# Altium PCB High Power Brushed DC MC.PcbDoc (part 1 of 2)
Units mil, origin at the board's own origin, x right, y up, seen from the top; angles counter-clockwise.
Board outline 3543.31 x 3641.73 mil, 4 copper layers (Top Layer, Ground, Power, Bottom Layer), stack 72.868 mil thick; 81 components, 28 nets, 205 pads, 180 vias.
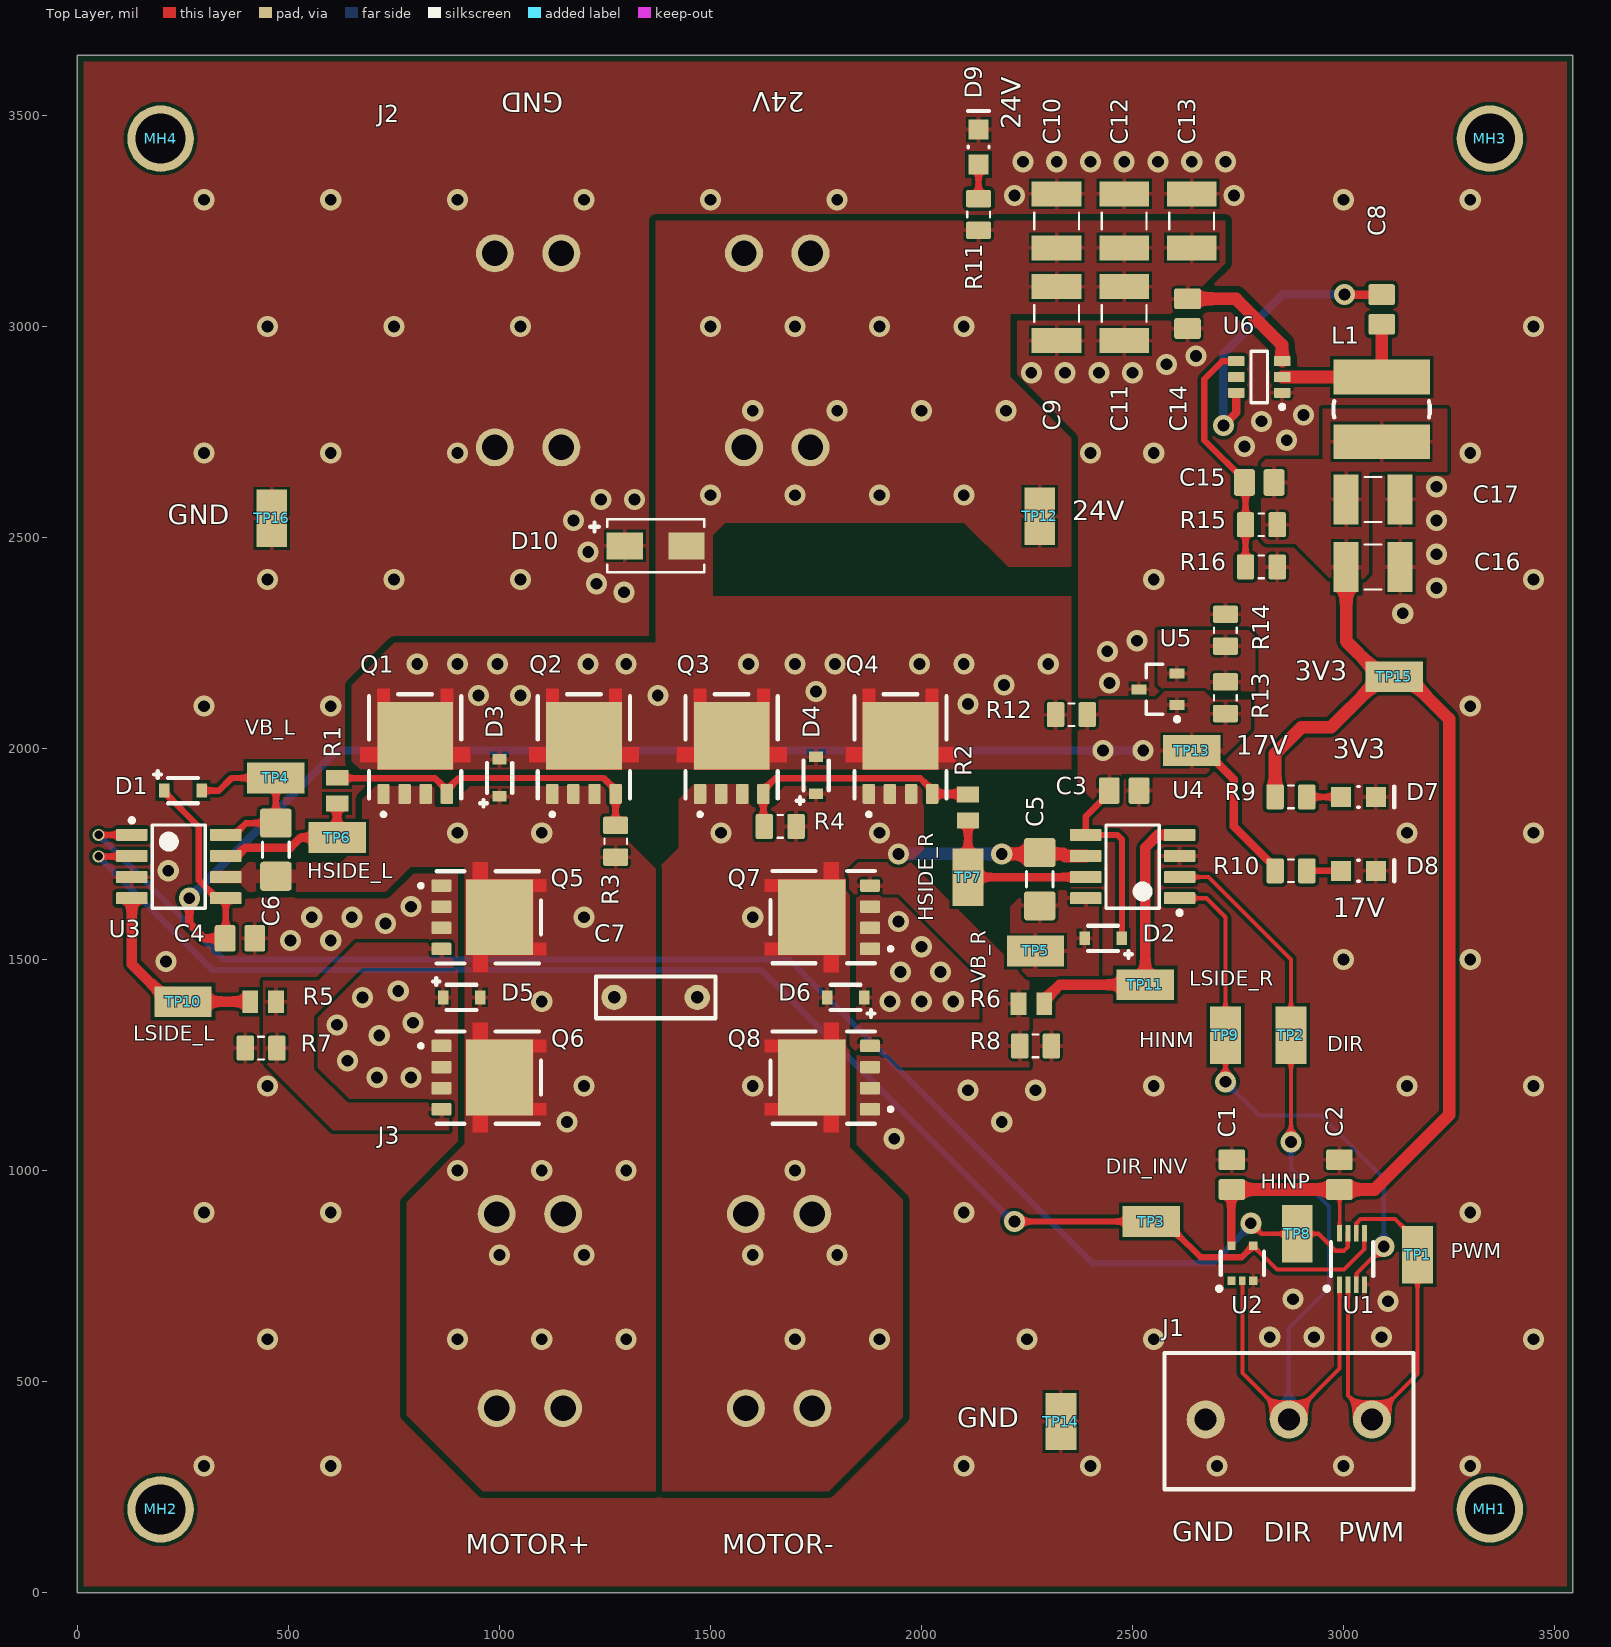
[diagram p0: Top Layer view]
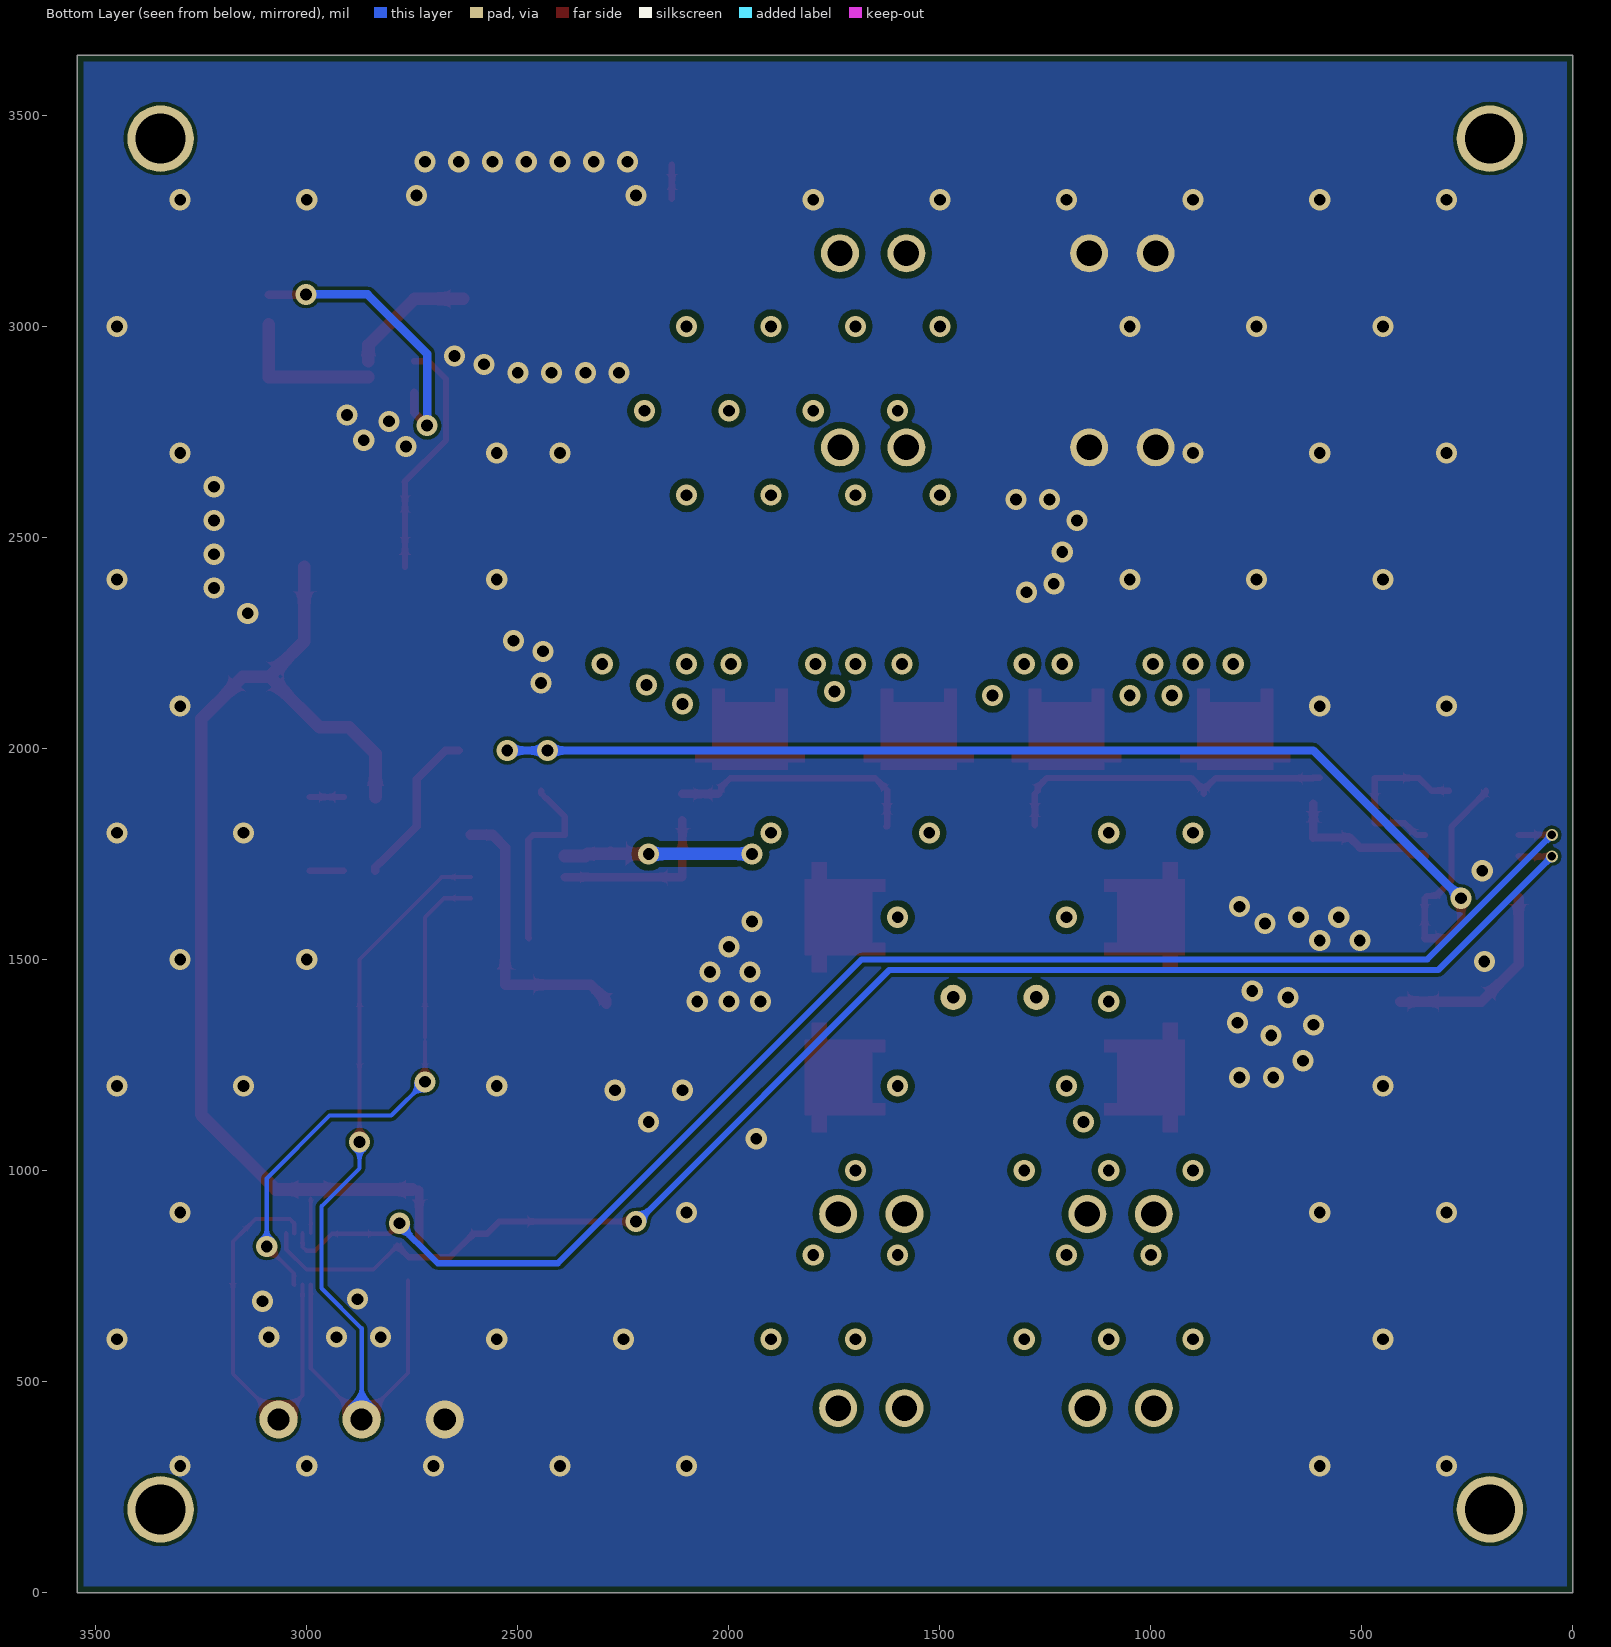
[diagram p1: Bottom Layer view, seen from below]
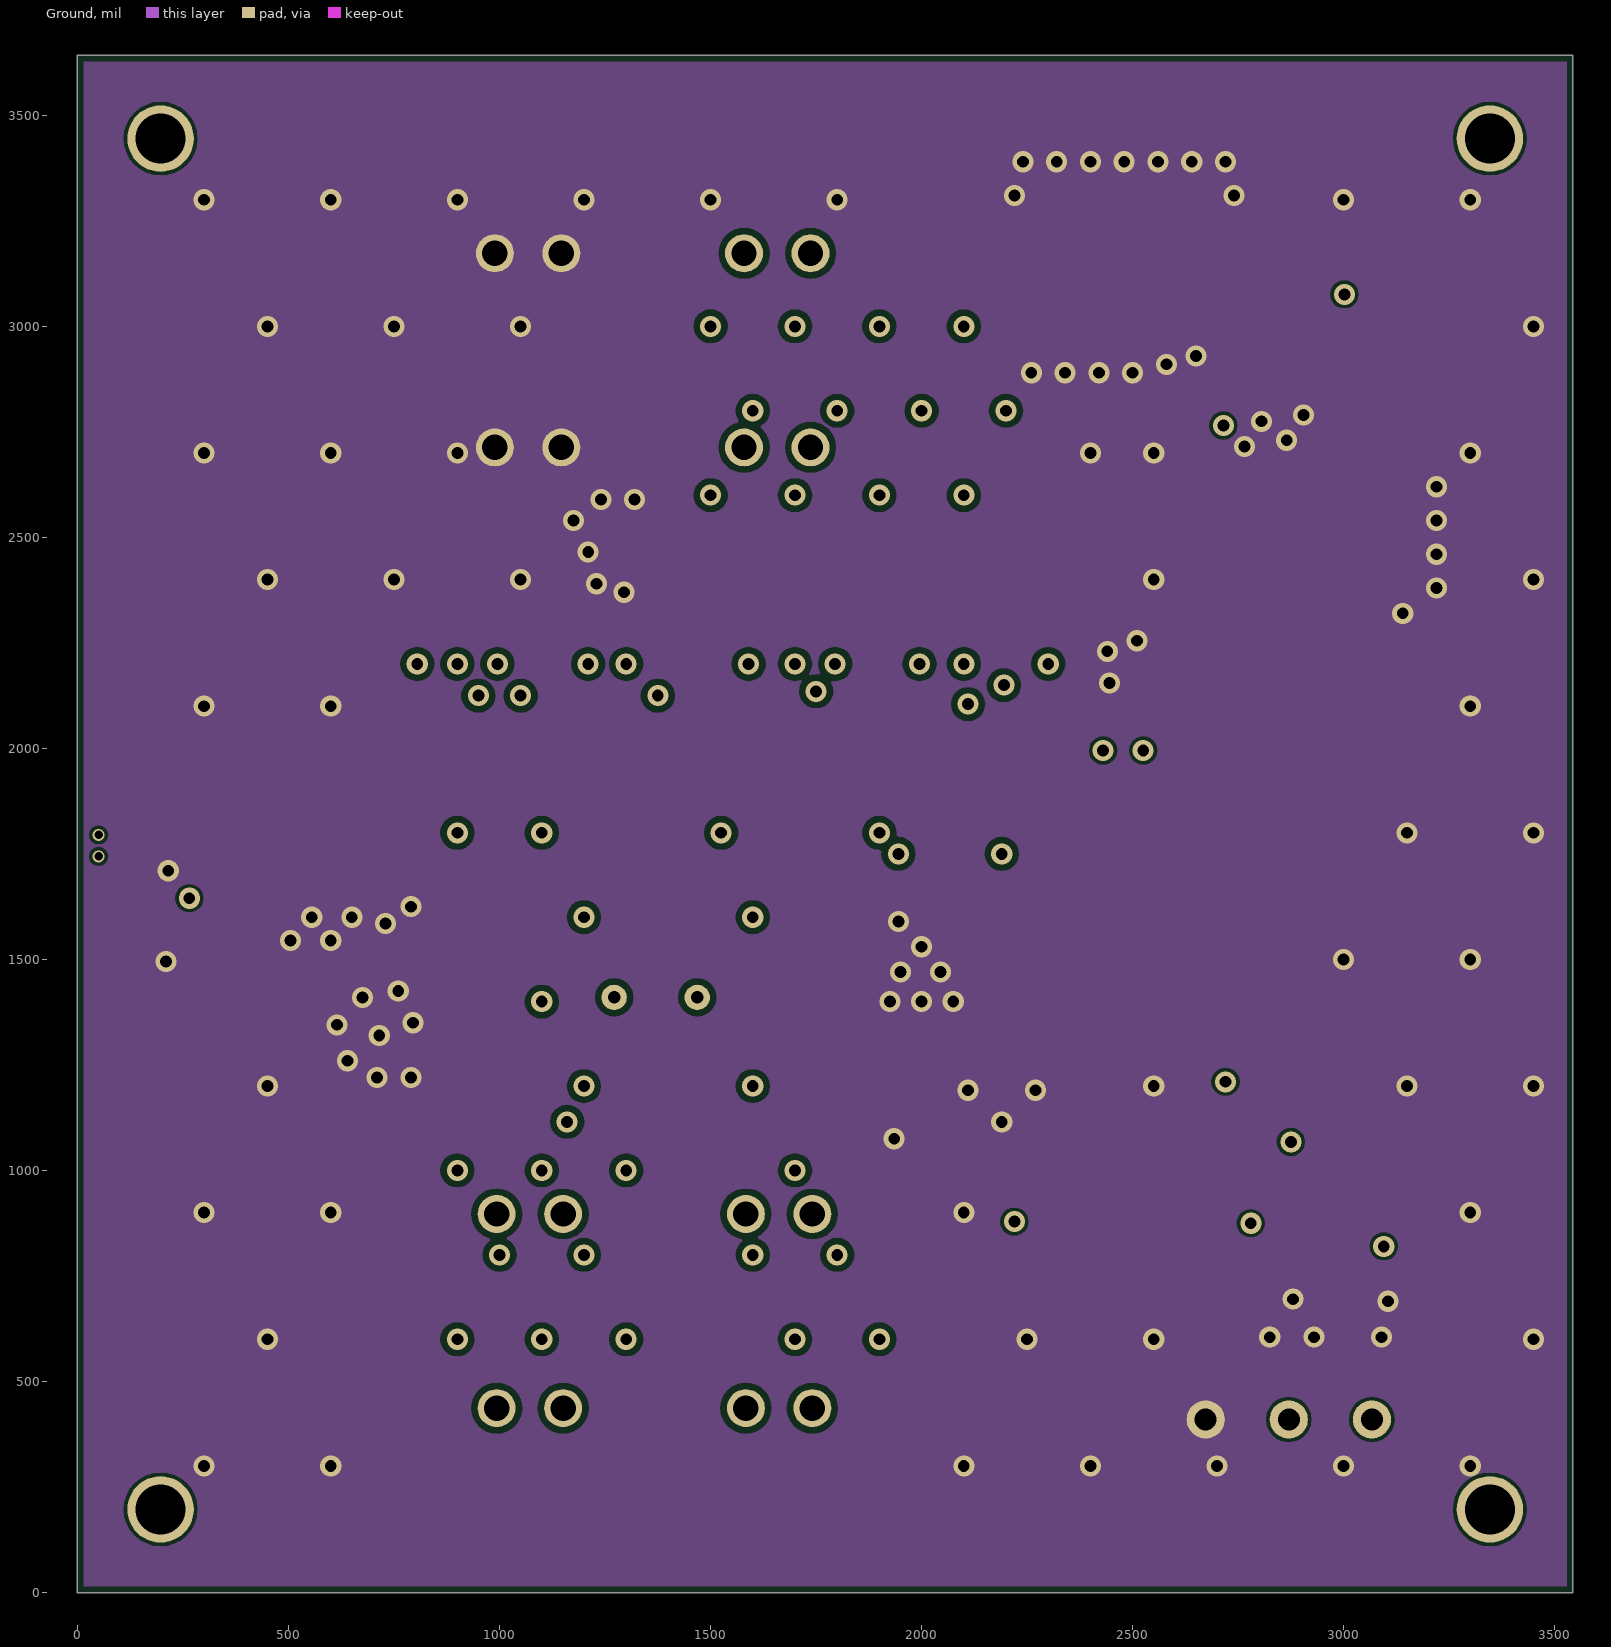
[diagram p2: Ground]
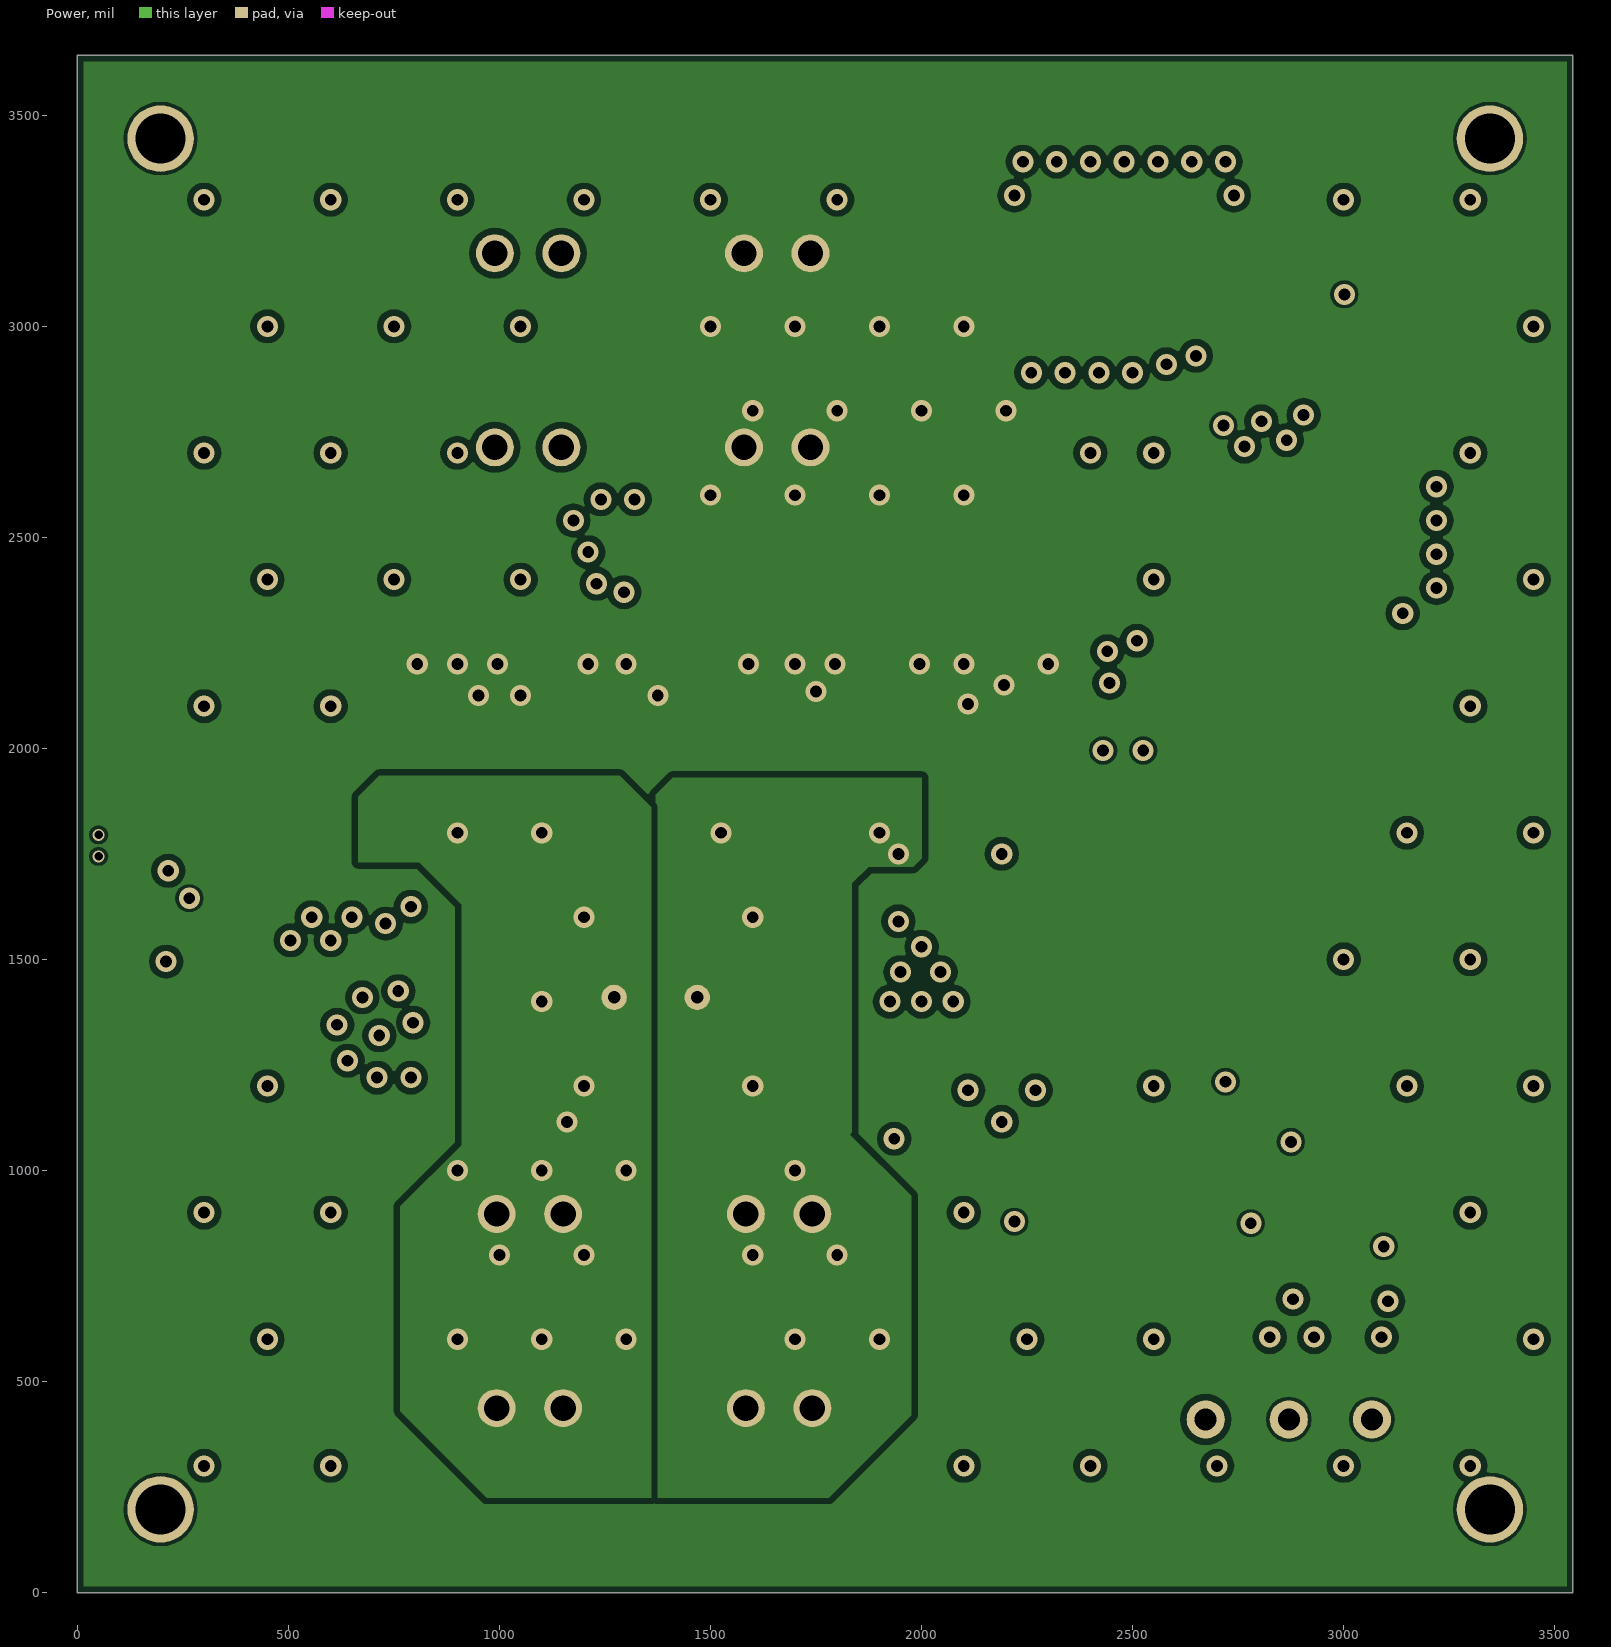
[diagram p3: Power]
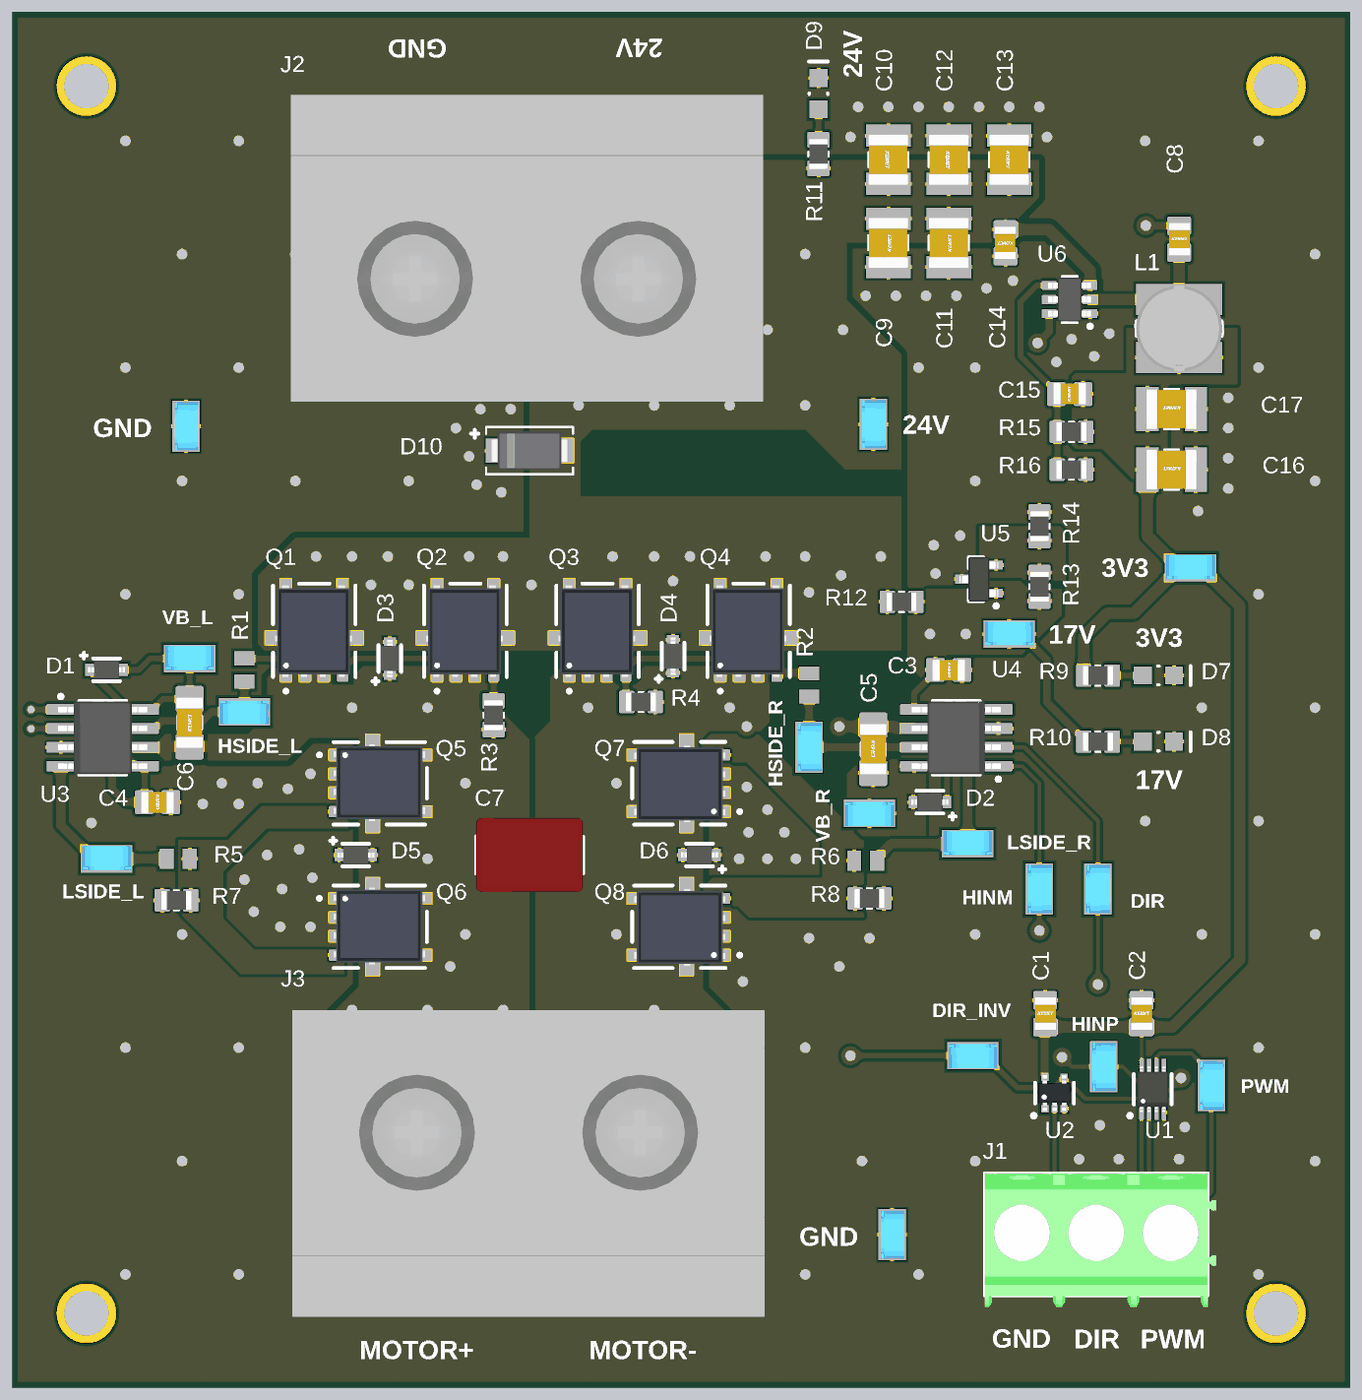
[diagram p4: 3D render of the assembled board from above, using the file's embedded part models]

## Layer stack, top to bottom
Top Solder: solder mask 1, SM-001, Dk 4
Top Layer: signal copper 2.756
Dielectric 2: prepreg 2.8, PP-006, Dk 4.1
Ground: signal copper 1.378
Dielectric 1: core 59, Core-043, Dk 4.3
Power: signal copper 1.378
Dielectric 3: prepreg 2.8, PP-006, Dk 4.1
Bottom Layer: signal copper 2.756
Bottom Solder: solder mask 1, SM-001, Dk 4

## Board outline
0,0 0,3641.73 3543.31,3641.73 3543.31,0

## Design rules (kind name [scope] priority, off if disabled: settings)
BoardOutlineClearance [All] p1: gap=15 ignorepadtopadclearanceinfootprint=FALSE
Clearance Clearance_HighV [InNet('24V') Or InNet('MOTOR_M') Or InNet('MOTOR_P') vs InNet('GND') Or InNet('MOTOR_M') Or InNet('MOTOR_P')] p1: gap=15 ignorepadtopadclearanceinfootprint=TRUE
Clearance [All] p2: gap=6 ignorepadtopadclearanceinfootprint=TRUE except(0: Arc-Hole Track-Hole SMDPad-Hole THPad-Hole Via-Hole Fill-Hole Poly-Hole Region-Hole Text-Hole; 8: Arc-Fill Arc-Poly Arc-Region Track-Fill Track-Poly Track-Region SMDPad-Fill SMDPad-Poly SMDPad-Region THPad-Fill THPad-Poly THPad-Region Via-Fill Via-Poly Via-Region Fill-Fill Fill-Poly Fill-Region Poly-Poly Poly-Region Region-Region)
ComponentClearance "HM-TRP & UFL" [InComponent('X1') vs InComponent('U1')] p1: gap=0 collisioncheckmode=3 verticalgap=0 showdistances=FALSE
ComponentClearance [All] p2: gap=1 collisioncheckmode=3 verticalgap=1 showdistances=FALSE
DiffPairsRouting [All] p1: maxlimit=393.7 minlimit=5 mostfreqgap=8 toplayer_minwidth=5 toplayer_maxwidth=15 toplayer_prefwidth=8 midlayer1_minwidth=5 midlayer1_maxwidth=15 midlayer1_prefwidth=8 midlayer2_minwidth=5 midlayer2_maxwidth=15 midlayer2_prefwidth=8 bottomlayer_minwidth=5 bottomlayer_maxwidth=15 bottomlayer_prefwidth=8 maxuncoupledlength=500
Height [All] p1: minheight=0 maxheight=2000 prefheight=500
HoleSize [All] p1: absolutevalues=TRUE maxlimit=265 minlimit=10 maxpercent=80.000 minpercent=20.000
HoleToHoleClearance [All] p1: gap=10 allowstackedmicrovias=FALSE
MinimumAnnularRing [All] p1: minimumring=4
MinimumSolderMaskSliver [All] p1: minsoldermaskwidth=0
PlaneClearance [All] p1: clearance=10
PlaneConnect [All] p1: planeconnectstyle=Relief reliefexpansion=4 reliefentries=4 reliefconductorwidth=6 reliefairgap=6
PolygonConnect "Via connect style" [isVia] p1: connectstyle=Direct reliefconductorwidth=10 reliefentries=4 polygonreliefangle="90 Angle" airgapwidth=10
PolygonConnect [All] p2: thpad.connectstyle=Direct thpad.reliefconductorwidth=10 thpad.reliefentries=4 thpad.polygonreliefangle="90 Angle" thpad.airgapwidth=6 smdpad.connectstyle=Relief smdpad.reliefconductorwidth=10 smdpad.reliefentries=4 smdpad.polygonreliefangle="90 Angle" smdpad.airgapwidth=6 via.connectstyle=Direct via.reliefconductorwidth=10 via.reliefentries=4 via.polygonreliefangle="90 Angle" via.airgapwidth=6
RoutingCorners [All] p1: cornerstyle=45-Degree minsetback=49.21 maxsetback=49.21
RoutingVias [All] p1: holewidth=12 width=22 viastyle="Through Hole" minholewidth=10 minwidth=18 maxholewidth=100 maxwidth=114
SilkToSilkClearance [All] p1: silktosilkclearance=0
SilkToSolderMaskClearance [IsPad] p1: minsilkscreentomaskgap=5 clearancetoexposedcopper=TRUE
SolderMaskExpansion [All] p1: expansion=2.5 istentingtop=FALSE
Width [All] p1: maxlimit=400 minlimit=6 preferedwidth=8
19 further rules are at their usual default settings.

## Classes and differential pairs
component class "SH2 - MOTOR CONTROLLER": C1 C2 C3 C4 C5 C6 C7 D1 D2 D3 D4 D5 D6 D7 D8 D9 J1 Q1 Q2 Q3 Q4 Q5 Q6 Q7 Q8 R1 R2 R3 R4 R5 R6 R7 R8 R9 R10 R11 U1 U2 U3 U4
component class "SH1 - CONNECTORS AND POWER": C8 C9 C10 C11 C12 C13 C14 C15 C16 C17 D10 J2 J3 L1 MH1 MH2 MH3 MH4 R12 R13 R14 R15 R16 U5 U6

## Components (designator, comment, footprint, x,y, rotation, side; value= is the part's Value field where it differs from the comment)
C1 "CAP_0.1uF_50V_0805" CAPC2012X140N 2735,990 r270 top value=0.1uF
C2 "CAP_0.1uF_50V_0805" CAPC2012X140N 2990,990 r270 top value=0.1uF
C3 "CAP_0.1uF_50V_0805" CAPC2012X140N 2480,1900 r180 top value=0.1uF
C4 "CAP_0.1uF_50V_0805" CAPC2012X140N 385,1550 r180 top value=0.1uF
C5 "CAP_8200pF_500V_1206" CAPC1206(3216) 2280,1690 r270 top
C6 "CAP_8200pF_500V_1206" CAPC1206(3216) 470,1760 r90 top
C7 "CAP_0.1uF_100V_FILM" MKS2D031001A00MSSD 1370,1410 r0 top
C8 "CAP_0.1uF_50V_0805" CAPC2012X140N 3090,3040 r270 top value=0.1uF
C9 "CAP_10uF_100V_1210" CAPC1210(3225) 2320,3030 r90 top
C10 "CAP_10uF_100V_1210" CAPC1210(3225) 2320,3250 r270 top
C11 "CAP_10uF_100V_1210" CAPC1210(3225) 2480,3030 r90 top
C12 "CAP_10uF_100V_1210" CAPC1210(3225) 2480,3250 r270 top
C13 "CAP_10uF_100V_1210" CAPC1210(3225) 2640,3250 r270 top
C14 "CAP_0.1uF_50V_0805" CAPC2012X140N 2630,3030 r90 top value=0.1uF
C15 "CAP_56pF_50V_0805" CAPC2012X140N 2800,2630 r0 top value=56pF
C16 "CAP_10uF_100V_1210" CAPC1210(3225) 3070,2430 r180 top
C17 "CAP_10uF_100V_1210" CAPC1210(3225) 3070,2590 r180 top
D1 "DIO_SCHOTTKY_30V_800mA" SOD-323_UNIDIR 250,1900 r0 top
D2 "DIO_SCHOTTKY_30V_800mA" SOD-323_UNIDIR 2430,1550 r180 top
D3 "DIO_SCHOTTKY_30V_800mA" SOD-323_UNIDIR 1000,1930 r90 top
D4 "DIO_SCHOTTKY_30V_800mA" SOD-323_UNIDIR 1750,1936.1 r90 top
D5 "DIO_SCHOTTKY_30V_800mA" SOD-323_UNIDIR 910,1410 r0 top
D6 "DIO_SCHOTTKY_30V_800mA" SOD-323_UNIDIR 1820,1410 r180 top
D7 "DIO_LED_G" LED_0805_LINE 3035,1885 r0 top
D8 "DIO_LED_Y" LED_0805_LINE 3035,1710 r0 top
D9 "DIO_LED_R" LED_0805_LINE 2135,3425 r90 top
D10 "P4SMA30A-E3/61" DO-214AC_UNI 1370,2480 r0 top
J1 "CON_3M_TERM" 1935174 2870,410 r180 top
J2 "SCREW_TERM_115A" MOLEX-0399200302 1540,2910 r180 top
J3 "SCREW_TERM_115A" MOLEX-0399200302 1190,700 r0 top
L1 "IND_33uH_880mA" IND_BOURNS_SDR0604 3090,2803.23 r0 top
MH1 "MOUNTING_HOLES" MOUNTING_HOLE 3346.46,196.85 r0 top
MH2 "MOUNTING_HOLES" MOUNTING_HOLE 196.85,196.85 r0 top
MH3 "MOUNTING_HOLES" MOUNTING_HOLE 3346.46,3444.88 r0 top
MH4 "MOUNTING_HOLES" MOUNTING_HOLE 196.85,3444.88 r0 top
Q1 "NTMFS4935NT1G" SO8-FL 800,1961.1 r180 top
Q2 "NTMFS4935NT1G" SO8-FL 1200,1961.1 r180 top
Q3 "NTMFS4935NT1G" SO8-FL 1550,1961.1 r180 top
Q4 "NTMFS4935NT1G" SO8-FL 1950,1961.1 r180 top
Q5 "NTMFS4935NT1G" SO8-FL 931.1,1599.76 r90 top
Q6 "NTMFS4935NT1G" SO8-FL 931.1,1220 r90 top
Q7 "NTMFS4935NT1G" SO8-FL 1808.9,1600 r270 top
Q8 "NTMFS4935NT1G" SO8-FL 1808.9,1220 r270 top
R1 "RES_5.1Ω_0805" RESC2013X70X40LL20T20 615,1900 r90 top value=5.1Ω
R2 "RES_5.1Ω_0805" RESC2013X70X40LL20T20 2110,1860 r270 top value=5.1Ω
R3 "RES_1kΩ_0805" RESC2012X60N 1275,1780 r270 top value=1kΩ
R4 "RES_1kΩ_0805" RESC2012X60N 1665,1815 r180 top value=1kΩ
R5 "RES_5.1Ω_0805" RESC2013X70X40LL20T20 440,1400 r0 top value=5.1Ω
R6 "RES_5.1Ω_0805" RESC2013X70X40LL20T20 2260,1395 r0 top value=5.1Ω
R7 "RES_1kΩ_0805" RESC2012X60N 435,1290 r180 top value=1kΩ
R8 "RES_1kΩ_0805" RESC2012X60N 2270,1295 r180 top value=1kΩ
R9 "RES_100Ω_0805" RESC2012X60N 2875,1885 r180 top value=100Ω
R10 "RES_1kΩ_0805" RESC2012X60N 2875,1710 r180 top value=1kΩ
R11 "RES_4.7kΩ_0805" RESC2012X60N 2135,3265 r270 top value=4.7kΩ
R12 "1kΩ" RESC2012X60N 2355,2080 r0 top
R13 "RES_604kΩ_0805" RESC2012X60N 2720,2120 r270 top
R14 "RES_105kΩ_0805" RESC2012X60N 2720,2280 r270 top
R15 "RES_100kΩ_0805" RESC2012X60N 2805,2530 r0 top
R16 "RES_22.1kΩ_0805" RESC2012X60N 2805,2430 r180 top
TP1 "TESTPOINT_SMD_LOOP" S1751-46R 3175,800 r90 top
TP2 "TESTPOINT_SMD_LOOP" S1751-46R 2875,1320 r90 top
TP3 "TESTPOINT_SMD_LOOP" S1751-46R 2544,879 r0 top
TP4 "TESTPOINT_SMD_LOOP" S1751-46R 470,1930 r180 top
TP5 "TESTPOINT_SMD_LOOP" S1751-46R 2270,1520 r0 top
TP6 "TESTPOINT_SMD_LOOP" S1751-46R 615.07,1788.76 r0 top
TP7 "TESTPOINT_SMD_LOOP" S1751-46R 2110,1695 r90 top
TP8 "TESTPOINT_SMD_LOOP" S1751-46R 2890,850 r90 top
TP9 "TESTPOINT_SMD_LOOP" S1751-46R 2720,1320 r90 top
TP10 "TESTPOINT_SMD_LOOP" S1751-46R 250,1400 r180 top
TP11 "TESTPOINT_SMD_LOOP" S1751-46R 2530,1440 r180 top
TP12 "TESTPOINT_SMD_LOOP" S1751-46R 2280,2550 r90 top
TP13 "TESTPOINT_SMD_LOOP" S1751-46R 2640,1995 r180 top
TP14 "TESTPOINT_SMD_LOOP" S1751-46R 2330,405 r90 top
TP15 "TESTPOINT_SMD_LOOP" S1751-46R 3120,2170 r180 top
TP16 "TESTPOINT_SMD_LOOP" S1751-46R 460,2545 r90 top
U1 "TC7WH08FK,LJ(CT" 8-VFSOP 3020,790 r0 top
U2 "74AHC1G04GW,125" SOT353 2760,780 r90 top
U3 "IRS2186STRPBF" 8-SOIC_M 240,1720 r0 top
U4 "IRS2186STRPBF" 8-SOIC_M 2500,1720 r180 top
U5 "ATL431LIBIDBZR" SOT23-3 2560,2140 r180 top
U6 "TPS54202HDDCR" SOT23-6 2800,2880 r180 top

## Footprints (in the part's own frame and the unit in brackets; to place one, negate y for a bottom-side part, rotate by r counter-clockwise, add the part's x,y. Pads: shape width x height; smd on the part's side, far side on the other; paste and mask are expansions set on the pad)
8-SOIC_M [mm] "SOIC, 8-Leads, Body 5x4mm, Pitch 1.27mm, IPC Low Density"
  rrect15% 1.9x0.72 smd: 1(-2.825,1.905) 2(-2.825,0.635) 3(-2.825,-0.635) 4(-2.825,-1.905) 5(2.825,-1.905) 6(2.825,-0.635) 7(2.825,0.635) 8(2.825,1.905)
  silkscreen extent -2.95,-2.5 1.6,2.9, body extent -3,-2.45 3,2.45, height 1.63
8-VFSOP [mm]
  rrect15% 0.3x1 smd: 1(-0.75,-1.55) 2(-0.25,-1.55) 3(0.25,-1.55) 4(0.75,-1.55) 5(0.75,1.55) 6(0.25,1.55) 7(-0.25,1.55) 8(-0.75,1.55)
  silkscreen extent -1.65,-1.9 1.27,1.02, body extent -1.05,-1.55 1.05,1.55, height 0.9
1935174 [mm] "5 MM PITCH"
  round 2.3 hole 1.325: 1(-5,0) 2(0,0) 3(5,0)
  silkscreen extent -7.5,-4 7.48,4.2, body extent -8.08,-4 7.48,5, height 11.41
CAPC1206(3216) [mm] "Chip Capacitor, Body 3.2x1.6mm, Height 0.55mm, IPC Medium Density"
  rrect20% 1.75x1.9 smd: 1(-1.6,0) 2(1.6,0)
  silkscreen extent -0.45,-0.8 0.45,0.8, body extent -1.7,-0.9 1.7,0.9, height 0.88
CAPC1210(3225) [mm]
  rect 1.5x3 smd: 1(-1.625,0) 2(1.625,0)
  silkscreen extent -0.51,-1.35 0.51,1.35, body extent -1.7,-1.35 1.7,1.35, height 2.1
CAPC2012X140N [mm]
  rrect20% 1.25x1.6 smd: 1(-0.895,0) 2(0.895,0)
  body extent -1.1,-0.7 1.1,0.75, height 1.41
DO-214AC_UNI [mm]
  rect 2.18x1.63 smd: 1(-1.857,0) 2(1.857,0)
  silkscreen extent -3.94,-1.59 2.92,1.59, body extent -2.6,-1.3 2.6,1.3, height 2.38
IND_BOURNS_SDR0604 [mm]
  rect 5.8x2.1 smd: 1(0,-1.95) 2(0,1.95)
  silkscreen extent -2.9,-0.49 2.9,0.49, body extent -2.9,-2.9 2.9,2.9, height 4.8
LED_0805_LINE [mm] "SMD, 2-Leads, Body 2x1.25mm"
  rect 1.2x1.2 smd: 1(-1.05,0) 2(1.05,0)
  silkscreen extent -0.05,-0.64 2.16,0.64, body extent -1,-0.63 1,0.63, height 0.8
MKS2D031001A00MSSD [mil]
  round 60 hole 30: 1(-98.43,0) 2(98.43,0)
  silkscreen extent -142,-49 142,49, body extent -142,-98 142,98, height 394
MOLEX-0399200302 [mil] "CONN, 4-Leads, Body 10.01x8.18mm, Pitch 2.54mm"
  round 90 hole 60: 1(-196.85,196.85) 1(-196.85,-263.15) 1(-39.37,196.85) 1(-39.37,-263.15) 2(393.7,196.85) 2(393.7,-263.15) 2(551.18,-263.15) 2(551.18,196.85)
  body extent -448,-512 802,300, height 1480
MOUNTING_HOLE [mm]
  round 4 hole 3 unplated: 0(0,0)
RESC2012X60N [mm]
  rrect20% 1.05x1.5 smd: 1(-0.955,0) 2(0.955,0)
  silkscreen extent -0.17,-0.68 0.17,0.68, body extent -1,-0.62 1,0.62, height 0.6
RESC2013X70X40LL20T20 [mm] "Chip Resistor, 2-Leads, Body 2.00x1.25mm, IPC High Density"
  rect 0.95x1.35 smd: 1(-0.775,0) 2(0.775,0)
  body extent -1.1,-0.72 1.1,0.72, height 0.7
S1751-46R [mm] "SMD LOOP TESTPOINT"
  rect 3.45x1.85 smd: 1(0,0)
  body extent -1.62,-0.84 1.62,0.76, height 2.01
SO8-FL [mm]
  rrect20% 0.75x1.2 smd: 1(-0.635,1.75) 1(0.635,1.75) 1(1.905,1.75) 2(-1.905,1.75)
  rect 4.56x4.055 smd mask+0: 3(0,-1.75)
  Top Layer region: -2.28,0.285 -2.28,-0.14 -3.302,-0.14 -3.302,-1.045 -2.28,-1.045 -2.28,-4.572 -1.53,-4.572 -1.53,-3.77 1.53,-3.77 1.53,-4.572 2.28,-4.572 2.28,-1.045 3.302,-1.045 3.302,-0.14 2.28,-0.14 2.28,0.285
  Top Layer region: 1.3,-4.415
  silkscreen extent -2.77,-4.24 2.78,3.08, body extent -2.53,-4.12 2.62,2.03, height 1.13
SOD-323_UNIDIR [mm]
  rect 0.63x0.83 smd: 1(-1.115,0) 2(1.115,0)
  silkscreen extent -1.73,-0.76 0.9,1.17, body extent -1.24,-0.62 1.24,0.62, height 1.1
SOT23-3 [mm] "SOT23, 3-Leads, Body 2.90x2.30mm, Pitch 0.95mm, IPC Medium Density"
  rect 0.9x0.6 smd: 1(-1.15,0.95) 2(-1.15,-0.95) 3(1.15,0)
  silkscreen extent -1.28,-1.5 0.7,1.92, body extent -1.3,-1.5 1.3,1.5, height 1.1
SOT23-6 [mm] "SOT23, 6-Leads, Body 3.05x1.75mm, Pitch 0.95mm, IPC Medium Density"
  rrect17% 1x0.6 smd: 1(-1.375,0.95) 2(-1.375,0) 3(-1.375,-0.95) 4(1.375,-0.95) 5(1.375,0) 6(1.375,0.95)
  silkscreen extent -1.5,-1.55 0.5,1.92, body extent -1.43,-1.48 1.43,1.49, height 0.9
SOT353 [mm] "TSSOP5, SC-70-5"
  rect 0.5x0.5 smd: 1(-1.05,0.65) 3(-1.05,-0.65) 4(1.05,-0.65) 5(1.05,0.65)
  rect 0.5x0.4 smd: 2(-1.05,0)
  silkscreen extent -1.65,-1.3 0.7,1.52, body extent -1.2,-1.1 1.2,1.1, height 1.1

## Part data
C1 C2 C3 C4 C8 C14: "CAP CER 0.1UF 50V X7R 0805", Capacitance=100nF, Case Code (Imperial)=0805, Case Code (Metric)=2012, Dielectric=X7R, Manufacturer 1="Murata Electronics", Manufacturer Part Number 1=GCD21BR71H104KA01L, Max Operating Temperature=125°C, Min Operating Temperature=-55°C, Ratings=AEC-Q200, Supplier Part Number 1=490-11955-1-ND, Tolerance=10%, Voltage Rating=50V, Case/Package=0805, ComponentLink1Description=https://datasheet.ciiva.com/29537/c03e-29537701.pdf?src-supplier=Digi-Key, ComponentLink1URL=https://datasheet.ciiva.com/29537/c03e-29537701.pdf?src-supplier=Digi-Key, Depth=1.25mm, Height=1.25mm, Length=2mm, Mount="Surface Mount", Supplier 1=Digi-Key, Termination=SMD/SMT, Thickness=0.049inch, Width=0.049inch
C5 C6: "Cap 0.0082uF 500Vdc C0G 5% SMD 1206 125°C Paper T/R", Capacitance=8200pF, Manufacturer 1=KEMET, Manufacturer Part Number 1=C1206C822JCGACAUTO, Package=1206, Supplier Part Number 1=399-14847-1-ND, Tolerance=5%, Voltage Rating (DC)=500V, Category="Ceramic Capacitors", ComponentLink1Description=https://datasheet.ciiva.com:443/pdfs/VipMasterIC/IC/KEME/KEME-S-A0008958438/KEME-S-A0008958438-1.pdf?src-supplier=IHS+Markit, ComponentLink1URL=https://datasheet.ciiva.com:443/pdfs/VipMasterIC/IC/KEME/KEME-S-A0008958438/KEME-S-A0008958438-1.pdf?src-supplier=IHS+Markit, ComponentLink2Description=http://www.farnell.com/datasheets/2746514.pdf?src-supplier=Farnell, ComponentLink2URL=http://www.farnell.com/datasheets/2746514.pdf?src-supplier=Farnell, ComponentLink3Description=http://www.farnell.com/datasheets/2746514.pdf?src-supplier=Newark, ComponentLink3URL=http://www.farnell.com/datasheets/2746514.pdf?src-supplier=Newark, Pricing 1="1=0.45000, 10=0.31800, 100=0.20960, 500=0.15528, 1000=0.13198 (USD)", RoHS=No, Stock 1=2611, Supplier 1=Digi-Key
C7: "CAP FILM 0.1UF 100V RADIAL", Capacitance=0.1uF, Case/Package=Radial, Dielectric=PET, Manufacturer 1=WIMA, Manufacturer Part Number 1=MKS2D031001A00MSSD, Max Operating Temperature=100°C, Min Operating Temperature=-55°C, Supplier Part Number 1=1928-1656-ND, Tolerance=20%, Voltage(AC)=63V, Voltage(DC)=100V, Category="Film Capacitors", ComponentLink1Description=https://datasheet.ciiva.com:443/pdfs/VipMasterIC/IC/WIMA/WIMA-S-A0007419204/WIMA-S-A0007419204-1.pdf?src-supplier=IHS+Markit, ComponentLink1URL=https://datasheet.ciiva.com:443/pdfs/VipMasterIC/IC/WIMA/WIMA-S-A0007419204/WIMA-S-A0007419204-1.pdf?src-supplier=IHS+Markit, ComponentLink2Description=https://datasheet.ciiva.com/26863/getdatasheetpartid-403283-26863662.pdf?src-supplier=Verical, ComponentLink2URL=https://datasheet.ciiva.com/26863/getdatasheetpartid-403283-26863662.pdf?src-supplier=Verical, Depth=2.5mm, Lead Diameter=0.5mm, Lead Pitch=5mm, Length=7.2mm, Packaging=Bulk, Pricing 1="1=0.43000, 10=0.30000, 100=0.17970, 500=0.13478, 1000=0.11381, 2500=0.10782, 5000=0.10183 (USD)", Radiation Hardening=No, RoHS=Yes, Stock 1=4135, Supplier 1=Digi-Key
C9 C10 C11 C12 C13 C16 C17: "CAP CER 10uF 100V X7S 10% 1210", Capacitance=10uF, Case Code (Imperial)=1210, Case Code (Metric)=3225, Manufacturer 1=Murata, Manufacturer Part Number 1=GRM32EC72A106KE05L, Max Operating Temperature=125°C, Min Operating Temperature=-55°C, Supplier Part Number 1=490-16266-1-ND, Tolerance=10%, Voltage Rating=100V, Case/Package=1210, Category="Ceramic Capacitors", ComponentLink1Description=https://psearch.en.murata.com:443/capacitor/product/GRM32EC72A106KE05%23.pdf?src-supplier=IHS+Markit, ComponentLink1URL=https://psearch.en.murata.com:443/capacitor/product/GRM32EC72A106KE05%23.pdf?src-supplier=IHS+Markit, ComponentLink2Description=http://search.murata.co.jp/Ceramy/image/img/A01X/G101/ENG/GRM32EC72A106KE05-01.pdf?src-supplier=Digi-Key, ComponentLink2URL=http://search.murata.co.jp/Ceramy/image/img/A01X/G101/ENG/GRM32EC72A106KE05-01.pdf?src-supplier=Digi-Key, Mount="Surface Mount", Packaging="Tape and Reel", Pricing 1="1=1.51000, 10=1.19500, 100=0.89660, 500=0.67740 (USD)", RoHS=No, Stock 1=5650, Supplier 1=Digi-Key
C15: "CAP CER 56PF 50V C0G/NP0", Case Code (Imperial)=0805, Case Code (Metric)=2012, Dielectric="C0G, NP0", Manufacturer 1=Yageo, Manufacturer Part Number 1=CC0805FRNPO9BN560, Max Operating Temperature=125°C, Min Operating Temperature=-55°C, Package="0805 (2012 Metric)", Supplier Part Number 1=311-4179-1-ND, Tolerance=1%, Voltage Rating=50V, Category="Ceramic Capacitors", Composition=Ceramic, Depth=1.25mm, Height=0.6mm, Length=2mm, Mount="Surface Mount", Supplier 1=Digi-Key, Termination=SMD/SMT, Thickness=0.028inch, Voltage Rating (DC)=50V, Weight=0.000194oz, Width=0.049inch
D1 D2 D3 D4 D5 D6: "DIODE SCHOTTKY 30V 800MA USC", Manufacturer 1="Toshiba Semiconductor and Storage", Manufacturer Part Number 1=CUS08F30,H3F, Supplier Part Number 1=CUS08F30H3FCT-ND, Io=800mA, Mount="Surface Mount", Supplier 1=Digi-Key, Vf (Max)=220mV, Vr (Max)=30V
D7: "LED GREEN DIFFUSED 0805 SMD", Forward Voltage Drop=2.2V, Manufacturer 1=OSRAM, Manufacturer Part Number 1="LG R971-KN-1", Package="0805 (2012 Metric)", Supplier Part Number 1=475-1410-1-ND, Mount="Surface Mount", Supplier 1=Digi-Key
D8: "LED YELLOW DIFFUSED 0805 SMD", Forward Voltage Drop=2.2V, Manufacturer 1=OSRAM, Manufacturer Part Number 1="LY R976-PS-36", Package="0805 (2012 Metric)", Supplier Part Number 1=475-2560-1-ND, Mount="Surface Mount", Supplier 1=Digi-Key
D9: "LED RED DIFFUSED 0805 SMD", Forward Voltage Drop=2V, Manufacturer 1=OSRAM, Manufacturer Part Number 1="LS R976-NR-1", Package="0805 (2012 Metric)", Supplier Part Number 1=475-1278-1-ND, Mount="Surface Mount", Supplier 1=Digi-Key
D10: "TVS DIODE, 400W, 25.6V, UNI, DO-214AC", Breakdown Voltage=28.5V, Case/Package=SMA, Clamping Voltage=41.4V, Leakage Current=1uA, Manufacturer 1="Vishay Semiconductors", Max Operating Temperature=150°C, Max Power Dissipation=400W, Max Surge Current=40A, Min Operating Temperature=-65°C, Operating Supply Voltage=25.6V, Package Quantity=1800, Peak Pulse Current=9.7A, Power Line Protection=No, Supplier Part Number 1=P4SMA30A-E3/61GICT-ND, Test Current=1mA, Category="TVS Diodes", ComponentLink1Description=https://datasheet.ciiva.com:443/pdfs/VipMasterIC/IC/VISH/VISH-S-A0008073361/VISH-S-A0008073361-1.pdf?src-supplier=IHS+Markit, ComponentLink1URL=https://datasheet.ciiva.com:443/pdfs/VipMasterIC/IC/VISH/VISH-S-A0008073361/VISH-S-A0008073361-1.pdf?src-supplier=IHS+Markit, ComponentLink2Description=https://datasheet.ciiva.com/343/p4sma-343073.pdf?src-supplier=Digi-Key, ComponentLink2URL=https://datasheet.ciiva.com/343/p4sma-343073.pdf?src-supplier=Digi-Key, Composition=Zener, Direction=Unidirectional, Element Configuration=Single, Manufacturer Part Number 1=P4SMA30A-E3/61, Max Reverse Leakage Current=1uA, Min Breakdown Voltage=28.5V, Mount="Surface Mount", Number of Channels=1, Number of Elements=1, Number of Pins=2, Number of Unidirectional Channels=1, Packaging="Tape and Reel", Peak Pulse Power=400W, Polarity=Unidirectional, Pricing 1="1=0.35000, 10=0.28400, 25=0.26000, 100=0.16340, 250=0.16152, 500=0.15126 (USD)", Reverse Breakdown Voltage=28.5V, Reverse Standoff Voltage=25.6V, RoHS=Yes, Stock 1=1849, Supplier 1=Digi-Key
J1: "TERM BLK 3POS SIDE ENTRY 5MM", Color=Green, Current=18A, Current Rating=17.5A, Flammability Rating="UL94 V-0", Manufacturer 1="Phoenix Contact", Manufacturer Part Number 1=1935174, Max Current Rating=16A, Max Supply Voltage=250V, Package Quantity=250, Supplier Part Number 1=277-1578-ND, Voltage=300V, Voltage Rating (DC)=320V, Approvals=UL,VDE,CB, Category="Terminal Blocks", ComponentLink1Description=https://datasheet.ciiva.com:443/pdfs/VipMasterIC/IC/PCON/PCON-S-A0007661889/PCON-S-A0008047997-1.pdf?src-supplier=IHS+Markit, ComponentLink1URL=https://datasheet.ciiva.com:443/pdfs/VipMasterIC/IC/PCON/PCON-S-A0007661889/PCON-S-A0008047997-1.pdf?src-supplier=IHS+Markit, ComponentLink2Description=https://datasheet.ciiva.com/16047/1935174-16047249.pdf?src-supplier=Onlinecomponents.com, ComponentLink2URL=https://datasheet.ciiva.com/16047/1935174-16047249.pdf?src-supplier=Onlinecomponents.com, ComponentLink3Description=https://datasheet.ciiva.com/15169/getdatasheetpartid-212213-15169949.pdf?src-supplier=Verical, ComponentLink3URL=https://datasheet.ciiva.com/15169/getdatasheetpartid-212213-15169949.pdf?src-supplier=Verical, ComponentLink4Description=https://datasheet.ciiva.com/823/combiconcompact5-0mmseries-823761.pdf?src-supplier=Digi-Key, ComponentLink4URL=https://datasheet.ciiva.com/823/combiconcompact5-0mmseries-823761.pdf?src-supplier=Digi-Key, ComponentLink5Description=https://datasheet.ciiva.com/29218/744167-da-01-en-printklemme-pt-1-5-3-5-0-h-29218252.pdf?src-supplier=Conrad, ComponentLink5URL=https://datasheet.ciiva.com/29218/744167-da-01-en-printklemme-pt-1-5-3-5-0-h-29218252.pdf?src-supplier=Conrad, Contact Material=Copper,Tin, Depth=9mm, Height=11.3mm, Housing Color=Green, Housing Material=Polyamide, Insulation Material=Nylon, Lead Free="Lead Free", Length=9mm, Material=Nylon, Mount="Through Hole", Number of Circuits=3, Number of Contacts=3, Number of Levels=1, Number of Pins=3, Number of Poles=3, Number of Positions=3, Number of Positions Per Level=3, Number of Rows=1, Orientation=Straight, Packaging=Bulk, Pitch=5mm, Pricing 1="1=0.60000, 10=0.58000, 50=0.55440, 100=0.53930, 250=0.50400, 500=0.46368, 1000=0.42840, 2500=0.42838 (USD)", Radiation Hardening=No, REACH SVHC=Unknown, RoHS=Yes, Stock 1=25144, Stripping Length=5mm, Supplier 1=Digi-Key, Termination=Solder, Voltage Rating=250V, Weight=0.100531oz, Width=15mm, Wire Gauge (Max)=26AWG, Wire Gauge (Min)=12AWG, Wire/Cable Gauge=26AWG
J2 J3: "CONN TERM BLOCK 2POS 15MM 1-8AWG", Color=Black, Current=115A, Manufacturer 1=Molex, Manufacturer Part Number 1=0399200302, Max Operating Temperature=130°C, Max Supply Voltage (AC)=600V, Min Operating Temperature=-40°C, Supplier Part Number 1=WM20114-ND, Category="Terminal Blocks", ComponentLink1Description=https://datasheet.ciiva.com/6751/399200305-sd-6751818.pdf?src-supplier=Digi-Key, ComponentLink1URL=https://datasheet.ciiva.com/6751/399200305-sd-6751818.pdf?src-supplier=Digi-Key, Contact Material=Copper, Contact Plating=Copper,Tin,Bright, Depth=20.32mm, Housing Color=Black, Housing Material=Polybutylene, Length=32mm, Max Voltage Rating (AC)=600V, Mount="Through Hole", Number of Circuits=2, Number of Contacts=2, Number of Levels=1, Number of Positions Per Level=2, Number of Rows=1, Orientation=Straight, Packaging=Bulk, Pitch=0.591inch, Plating=Brass,Bronze,Tin, Pricing 2="1=9.66000, 10=8.27400, 25=7.89600, 50=7.09800, 100=6.72000, 250=6.09000, 500=5.67000, 1000=5.35500, 5000=5.04000 (USD)", Radiation Hardening=No, RoHS=Yes, Stock 2=268, Supplier 1=Digi-Key, Termination=Solder, Voltage=600V, Wire Gauge (Max)=8AWG, Wire Gauge (Min)=1AWG
L1: "IND, 33uH, 10%, 1 Element, Ferrite-Core, SMD", Case/Package=Nonstandard, Current Rating=880mA, DC Resistance (DCR)=250mR, Inductance=33uH, Inductance Tolerance=10%, Manufacturer 1=Bourns, Manufacturer Part Number 1=SDR0604-330KL, Max Operating Temperature=125°C, Min Operating Temperature=-40°C, Package Quantity=400, Resistance=250MR, Saturation Current=1.1A, Self Resonant Frequency=13MHz, Supplier Part Number 1=SDR0604-330KLCT-ND, Test Frequency=1kHz, Category="Fixed Inductors", ComponentLink1Description=https://datasheet.ciiva.com:443/pdfs/VipMasterIC/IC/BOUR/BOUR-S-A0006604757/BOUR-S-A0006604757-1.pdf?src-supplier=IHS+Markit, ComponentLink1URL=https://datasheet.ciiva.com:443/pdfs/VipMasterIC/IC/BOUR/BOUR-S-A0006604757/BOUR-S-A0006604757-1.pdf?src-supplier=IHS+Markit, ComponentLink2Description=https://datasheet.ciiva.com/11802/0900766b80f2b58d-11802553.pdf?src-supplier=RSComponents, ComponentLink2URL=https://datasheet.ciiva.com/11802/0900766b80f2b58d-11802553.pdf?src-supplier=RSComponents, ComponentLink3Description=https://datasheet.ciiva.com/8516/sdr0604-8516774.pdf?src-supplier=Avnet, ComponentLink3URL=https://datasheet.ciiva.com/8516/sdr0604-8516774.pdf?src-supplier=Avnet, ComponentLink4Description=https://datasheet.ciiva.com/22697/1635216-22697302.pdf?src-supplier=Element14, ComponentLink4URL=https://datasheet.ciiva.com/22697/1635216-22697302.pdf?src-supplier=Element14, ComponentLink5Description=https://datasheet.ciiva.com/6689/sdr0604-6689448.pdf?src-supplier=Digi-Key, ComponentLink5URL=https://datasheet.ciiva.com/6689/sdr0604-6689448.pdf?src-supplier=Digi-Key, ComponentLink6Description=https://datasheet.ciiva.com/7838/1635216-7838921.pdf?src-supplier=Element14, ComponentLink6URL=https://datasheet.ciiva.com/7838/1635216-7838921.pdf?src-supplier=Element14, ComponentLink7Description=https://datasheet.ciiva.com/6689/sdr0604-6689450.pdf?src-supplier=Digi-Key, ComponentLink7URL=https://datasheet.ciiva.com/6689/sdr0604-6689450.pdf?src-supplier=Digi-Key, ComponentLink8Description=https://datasheet.ciiva.com/8515/sdr0604-8515983.pdf?src-supplier=Avnet, ComponentLink8URL=https://datasheet.ciiva.com/8515/sdr0604-8515983.pdf?src-supplier=Avnet, Composition=Wirewound, Core Material=Ferrite, DC Current=880mA, Diameter=5.8mm, Height=4.8mm, Height - Seated (Max)=0.189inch, Length=0.228inch, Max DC Current=880mA, Military Standard=Not, Mount="Surface Mount", Number of Pins=2, Packaging="Tape and Reel", Pricing 1="1=0.60000, 10=0.52300, 100=0.37380 (USD)", Q Factor=24, Radiation Hardening=No, REACH SVHC="No SVHC", RMS Current (Irms)=880mA, RoHS=Yes, Shielding=Unshielded, Stock 1=4659, Supplier 1=Digi-Key, Termination=SMD/SMT, Tolerance=10%, Width=0.228inch
MH1 MH2 MH3 MH4: "6cm x 6cm"
Q1 Q2 Q3 Q4 Q5 Q6 Q7 Q8: "MOSFET N-CH 30V 13A SO8FL", Case/Package=SO, Continuous Drain Current (ID)=93A, Drain to Source Breakdown Voltage=30V, Drain to Source Resistance=3.2mR, Gate to Source Voltage (Vgs)=20V, Input Capacitance=4.85nF, Manufacturer 1="ON Semiconductor", Max Operating Temperature=150°C, Max Power Dissipation=48W, Min Operating Temperature=-55°C, Package Quantity=1, Power Dissipation=2.63W, Supplier Part Number 1=NTMFS4935NT1GOSCT-ND, Threshold Voltage=1.63V, Category=MOSFETs, ComponentLink1Description=https://datasheet.ciiva.com:443/pdfs/VipMasterIC/IC/ONSM/ONSM-S-A0008367025/ONSM-S-A0008367025-1.pdf?src-supplier=IHS+Markit, ComponentLink1URL=https://datasheet.ciiva.com:443/pdfs/VipMasterIC/IC/ONSM/ONSM-S-A0008367025/ONSM-S-A0008367025-1.pdf?src-supplier=IHS+Markit, ComponentLink2Description=https://datasheet.ciiva.com/22641/1707323-22641681.pdf?src-supplier=Element14, ComponentLink2URL=https://datasheet.ciiva.com/22641/1707323-22641681.pdf?src-supplier=Element14, ComponentLink3Description=https://datasheet.ciiva.com/947/ntmfs4935n-d-947308.pdf?src-supplier=Digi-Key, ComponentLink3URL=https://datasheet.ciiva.com/947/ntmfs4935n-d-947308.pdf?src-supplier=Digi-Key, ComponentLink4Description=https://datasheet.ciiva.com/11166/ntmfs4935n-d-11166461.pdf?src-supplier=Avnet, ComponentLink4URL=https://datasheet.ciiva.com/11166/ntmfs4935n-d-11166461.pdf?src-supplier=Avnet, ComponentLink5Description=https://datasheet.ciiva.com/947/ntmfs4935n-d-947310.pdf?src-supplier=Digi-Key, ComponentLink5URL=https://datasheet.ciiva.com/947/ntmfs4935n-d-947310.pdf?src-supplier=Digi-Key, ComponentLink6Description=https://datasheet.ciiva.com/947/ntmfs4935n-d-947309.pdf?src-supplier=Digi-Key, ComponentLink6URL=https://datasheet.ciiva.com/947/ntmfs4935n-d-947309.pdf?src-supplier=Digi-Key, Contact Plating=Tin,Matte, Drain to Source Voltage (Vdss)=30V, Element Configuration=Single, Fall Time=6.6ns, Height=1.1mm, Lead Free="Lead Free", Length=5.1mm, Nominal Vgs=1.63V, Number of Elements=1, Number of Pins=5, Packaging="Tape and Reel", Pricing 1="1=0.87000, 10=0.76800, 25=0.72160, 100=0.52380, 250=0.50516, 500=0.43766 (USD)", Radiation Hardening=No, Rds On Max=3.2mR, REACH SVHC="No SVHC", Rise Time=20ns, RoHS=Yes, Stock 1=10192, Supplier 1=Digi-Key, Turn-Off Delay Time=27.5ns, Turn-On Delay Time=16.3ns, Width=6.1mm
  Q2 Q3 Q6 Q8: Manufacturer Part Number 1=NTMFS4935NT1G
R1 R2 R5 R6: "RES SMD 5.1 OHM 5% 1/8W 0805", Case Code (Imperial)=0805, Case Code (Metric)=2012, Manufacturer 1=Panasonic, Manufacturer Part Number 1=ERJ-6GEYJ5R1V, Supplier Part Number 1=P5.1ACT-ND, Mount="Surface Mount", Supplier 1=Digi-Key
R3 R4 R7 R8 R10: "RES SMD 1K OHM 1% 1/8W 0805", Case Code (Imperial)=0805, Case Code (Metric)=2012, Manufacturer 1=Yageo, Manufacturer Part Number 1=RC0805FR-071KL, Max Operating Temperature=155°C, Min Operating Temperature=-55°C, Power Rating=125mW, Resistance=1K, Supplier Part Number 1=311-1.00KCRCT-ND, Tolerance=1%, Supplier 1=Digi-Key, Termination=SMD/SMT
R9: "RES SMD 100 OHM 1% 1/8W 0805", Case Code (Imperial)=0805, Case Code (Metric)=2012, Manufacturer 1=Yageo, Manufacturer Part Number 1=RC0805FR-07100RL, Power Rating=125mW, Supplier Part Number 1=311-100CRCT-ND, Mount="Surface Mount", Supplier 1=Digi-Key
R11: "RES SMD 4.7K OHM 5% 1/8W 0805", Case Code (Imperial)=0805, Case Code (Metric)=2012, Case/Package=Molded, Manufacturer 1=Yageo, Manufacturer Part Number 1=RC0805JR-074K7L, Max Operating Temperature=155°C, Min Operating Temperature=-55°C, Power Rating=125mW, Resistance=4.7kR, Supplier Part Number 1=311-4.7KARCT-ND, Temperature Coefficient=100ppm/°C, Tolerance=5%, Voltage Rating=150V, ComponentLink1Description=https://datasheet.ciiva.com/7941/442941-7941973.pdf?src-supplier=Element14, ComponentLink1URL=https://datasheet.ciiva.com/7941/442941-7941973.pdf?src-supplier=Element14, ComponentLink2Description=https://datasheet.ciiva.com/7941/442941-7941974.pdf?src-supplier=Element14, ComponentLink2URL=https://datasheet.ciiva.com/7941/442941-7941974.pdf?src-supplier=Element14, ComponentLink3Description=https://datasheet.ciiva.com/17486/rc0805-17486827.pdf?src-supplier=Future+Electronics, ComponentLink3URL=https://datasheet.ciiva.com/17486/rc0805-17486827.pdf?src-supplier=Future+Electronics, ComponentLink4Description=https://datasheet.ciiva.com/12667/rc0805-12667037.pdf?src-supplier=Mouser, ComponentLink4URL=https://datasheet.ciiva.com/12667/rc0805-12667037.pdf?src-supplier=Mouser, Composition="Thick Film", Contact Plating=Tin,Lead,Matte, Depth=1.25mm, Lead Free="Lead Free", Length=2mm, Military Standard=Not, Mount="Surface Mount", Packaging="Tape and Reel", Pricing 1="1=0.10000, 10=0.03500, 100=0.01400, 1000=0.00631, 2500=0.00548 (USD)", Radiation Hardening=No, REACH SVHC=Unknown, RoHS=Yes, Stock 1=2755291, Supplier 1=Digi-Key, Termination=SMD/SMT
R12: library part RES_1kΩ_0805, "RES SMD 1K OHM 1% 1/8W 0805", Case Code (Imperial)=0805, Case Code (Metric)=2012, Manufacturer 1=Yageo, Manufacturer Part Number 1=RC0805FR-071KL, Max Operating Temperature=155°C, Max Power Dissipation=125mW, Min Operating Temperature=-55°C, Package="0805 (2012 Metric)", Resistance=1K, Supplier Part Number 1=311-1.00KCRCT-ND, Temperature Coefficient=25ppm/°C, Tolerance=1%, Voltage Rating=150V, Case/Package=0805, Composition="Thin Film", Contact Plating=Tin, Depth=1.25mm, Features="Moisture Resistant,Automotive AEC-Q200,Anti-Sulfur", Height=0.022inch, Length=2mm, Military Standard=Not, Mount="Surface Mount", Number of Pins=2, Number of Terminations=2, Power Rating=125mW, REACH SVHC=Unknown, Supplier 1=Digi-Key, Termination=SMD/SMT, Voltage Rating (DC)=150V, Weight=0.000194oz, Width=0.049inch
R13: "RES SMD 604K OHM 0.1% 1/4W 0805", Case Code (Imperial)=0805, Case Code (Metric)=2012, Manufacturer 1=Panasonic, Manufacturer Part Number 1=ERJ-PB6B6043V, Max Operating Temperature=155°C, Max Power Dissipation=250mW, Min Operating Temperature=-55°C, Resistance=604kΩ, Supplier Part Number 1=P20911CT-ND, Temperature Coefficient=50ppm/°C, Tolerance=0.1%, Case/Package=0805, Category="Chip SMD Resistors", ComponentLink1Description=https://industrial.panasonic.com/sa/system/files/data/download/catalog/id_fixed-resistors_e_2.pdf?src-supplier=Digi-Key, ComponentLink1URL=https://industrial.panasonic.com/sa/system/files/data/download/catalog/id_fixed-resistors_e_2.pdf?src-supplier=Digi-Key, Composition="Thick Film", Features="Automotive AEC-Q200", Height - Seated (Max)=0.028inch, Length=0.079inch, Number of Terminations=2, Packaging="Tape and Reel", Pricing 1="1=0.36000, 10=0.30600, 25=0.22280, 50=0.16140, 100=0.11970, 250=0.09184, 500=0.07236, 1000=0.05009 (USD)", RoHS=Yes, Stock 1=1993, Supplier 1=Digi-Key, Width=0.049inch
R14: "RES SMD 105K OHM 0.1% 1/8W 0805", Case Code (Imperial)=0805, Case Code (Metric)=2012, Manufacturer 1=Panasonic, Manufacturer Part Number 1=ERA-6AEB1053V, Max Operating Temperature=155°C, Max Power Dissipation=125mW, Min Operating Temperature=-55°C, Package Quantity=5000, Resistance=105kΩ, Supplier Part Number 1=P105KDACT-ND, Temperature Coefficient=25ppm/°C, Tolerance=0.1%, Voltage Rating=100V, Case/Package=0805, Category="Chip SMD Resistors", ComponentLink1Description=https://datasheet.ciiva.com/11810/0900766b80eb1d8c-11810401.pdf?src-supplier=RSComponents, ComponentLink1URL=https://datasheet.ciiva.com/11810/0900766b80eb1d8c-11810401.pdf?src-supplier=RSComponents, ComponentLink2Description=https://datasheet.ciiva.com/41450/001181353-da-01-en-widerstand-era-0805-105k-0-1-5000st-41450513.pdf?src-supplier=Conrad, ComponentLink2URL=https://datasheet.ciiva.com/41450/001181353-da-01-en-widerstand-era-0805-105k-0-1-5000st-41450513.pdf?src-supplier=Conrad, ComponentLink3Description=https://datasheet.ciiva.com/5950/485442-5950968.pdf?src-supplier=Farnell, ComponentLink3URL=https://datasheet.ciiva.com/5950/485442-5950968.pdf?src-supplier=Farnell, ComponentLink4Description=https://datasheet.ciiva.com/5950/485442-5950970.pdf?src-supplier=Farnell, ComponentLink4URL=https://datasheet.ciiva.com/5950/485442-5950970.pdf?src-supplier=Farnell, ComponentLink5Description=https://datasheet.ciiva.com/17207/aoa0000ce26-17207943.pdf?src-supplier=Avnet+Europe, ComponentLink5URL=https://datasheet.ciiva.com/17207/aoa0000ce26-17207943.pdf?src-supplier=Avnet+Europe, ComponentLink6Description=https://datasheet.ciiva.com/7853/485442-7853533.pdf?src-supplier=Element14, ComponentLink6URL=https://datasheet.ciiva.com/7853/485442-7853533.pdf?src-supplier=Element14, ComponentLink7Description=https://datasheet.ciiva.com/5950/485442-5950967.pdf?src-supplier=Farnell, ComponentLink7URL=https://datasheet.ciiva.com/5950/485442-5950967.pdf?src-supplier=Farnell, ComponentLink8Description=https://datasheet.ciiva.com/5950/485442-5950969.pdf?src-supplier=Farnell, ComponentLink8URL=https://datasheet.ciiva.com/5950/485442-5950969.pdf?src-supplier=Farnell, ComponentLink9Description=https://datasheet.ciiva.com/7853/485442-7853532.pdf?src-supplier=Element14, ComponentLink9URL=https://datasheet.ciiva.com/7853/485442-7853532.pdf?src-supplier=Element14, Composition="Metal Film,Thin Film", Contact Plating=Tin, Depth=1.25mm, Height=0.5mm, Lead Free="Lead Free", Length=2mm, Mount="Surface Mount", Number of Pins=2, Number of Terminations=2, Packaging="Tape and Reel", Power Rating=125mW, Pricing 1="1=0.34000, 10=0.28800, 100=0.11260, 1000=0.04712, 2500=0.04320 (USD)", Radiation Hardening=No, RoHS=Yes, Stock 1=6757, Supplier 1=Digi-Key, Termination=Solder, Voltage Rating (DC)=100V, Width=1.25mm
R15: "RES SMD 100K OHM 0.5% 1/8W 0805", Case Code (Imperial)=0805, Case Code (Metric)=2012, Manufacturer 1=Panasonic, Manufacturer Part Number 1=ERA-6AED104V, Max Operating Temperature=155°C, Min Operating Temperature=-55°C, Package Quantity=5000, Power Rating=125mW, Resistance=100kΩ, Supplier Part Number 1=P123795CT-ND, Temperature Coefficient=25ppm/°C, Tolerance=0.5%, Voltage Rating=200V, Case/Package=0805, Category="Chip SMD Resistors", ComponentLink1Description=https://datasheet.ciiva.com:443/pdfs/VipMasterIC/IC/PANA/PANA-S-A0009459258/PANA-S-A0009459258-1.pdf?src-supplier=IHS+Markit, ComponentLink1URL=https://datasheet.ciiva.com:443/pdfs/VipMasterIC/IC/PANA/PANA-S-A0009459258/PANA-S-A0009459258-1.pdf?src-supplier=IHS+Markit, ComponentLink2Description=https://datasheet.ciiva.com/9186/aoa0000ce26-9186773.pdf?src-supplier=Avnet, ComponentLink2URL=https://datasheet.ciiva.com/9186/aoa0000ce26-9186773.pdf?src-supplier=Avnet, Composition="Thin Film", Contact Plating=Tin, Depth=1.25mm, Height=0.5mm, Lead Free="Lead Free", Length=2mm, Military Standard=Not, Mount="Surface Mount", Packaging="Tape and Reel", Pricing 1="1=0.11000, 10=0.10300, 25=0.07120, 50=0.05540, 100=0.03960, 250=0.03088, 500=0.02456, 1000=0.01742 (USD)", RoHS=Yes, Stock 1=16167, Supplier 1=Digi-Key, Termination=SMD/SMT, Width=1.25mm
R16: "RES SMD 22.1K OHM 1% 1/8W 0805", Case Code (Imperial)=0805, Case Code (Metric)=2012, Manufacturer 1="Vishay Dale", Manufacturer Part Number 1=CRCW080522K1FKEA, Max Operating Temperature=155°C, Min Operating Temperature=-55°C, Power Rating=125mW, Resistance=22.1kΩ, Supplier Part Number 1=541-22.1KCCT-ND, Tolerance=1%, Supplier 1=Digi-Key, Termination=SMD/SMT
TP1 TP2 TP3 TP4 TP5 TP6 TP7 TP8 TP9 TP10 TP11 TP12 TP13 TP14 TP15 TP16: Color=Natural, Manufacturer 1=Harwin, Manufacturer Part Number 1=S1751-46R, Package Quantity=2500, Supplier Part Number 1=952-1478-1-ND, Category="Terminal Blocks", ComponentLink1Description=https://datasheet.ciiva.com:443/pdfs/VipMasterIC/IC/HRWN/HRWN-S-A0002541722/HRWN-S-A0004513972-1.pdf?src-supplier=IHS+Markit, ComponentLink1URL=https://datasheet.ciiva.com:443/pdfs/VipMasterIC/IC/HRWN/HRWN-S-A0002541722/HRWN-S-A0004513972-1.pdf?src-supplier=IHS+Markit, ComponentLink2Description=https://datasheet.ciiva.com/5224/2010page161-58228-5224784.pdf?src-supplier=Mouser, ComponentLink2URL=https://datasheet.ciiva.com/5224/2010page161-58228-5224784.pdf?src-supplier=Mouser, ComponentLink3Description=https://datasheet.ciiva.com/22631/1688119-22631153.pdf?src-supplier=Element14, ComponentLink3URL=https://datasheet.ciiva.com/22631/1688119-22631153.pdf?src-supplier=Element14, ComponentLink4Description=https://datasheet.ciiva.com/2917/s1751-2917604.pdf?src-supplier=Digi-Key, ComponentLink4URL=https://datasheet.ciiva.com/2917/s1751-2917604.pdf?src-supplier=Digi-Key, ComponentLink5Description=https://datasheet.ciiva.com/1462/1693781-1462652.pdf?src-supplier=Farnell, ComponentLink5URL=https://datasheet.ciiva.com/1462/1693781-1462652.pdf?src-supplier=Farnell, ComponentLink6Description=https://datasheet.ciiva.com/1454/1693781-1454941.pdf?src-supplier=Element14, ComponentLink6URL=https://datasheet.ciiva.com/1454/1693781-1454941.pdf?src-supplier=Element14, Contact Material="Copper,Copper Alloy", Contact Plating=Tin, Depth=2mm, Height=2mm, Length=3.25mm, Material="Brass,Copper Alloy", Mount="Surface Mount", Number of Contacts=1, Number of Ports=1, Orientation=Straight, Packaging="Tape and Reel", Plating=Tin, Pricing 1="1=0.29000, 10=0.27700, 25=0.23760, 50=0.20200, 100=0.19400, 250=0.17424, 500=0.16632, 1000=0.13860 (USD)", Radiation Hardening=No, REACH SVHC="No SVHC", RoHS=Yes, Stock 1=159143, Supplier 1=Digi-Key, Termination=Solder, Width=1.65mm
U1: "AND Gate 2-Element 2-IN CMOS Automotive 8-Pin SSOP T/R", High Level Output Current=8mA, Manufacturer 1=Toshiba, Max Operating Temperature=85°C, Min Operating Temperature=-40°C, Quiescent Current=2uA, Supplier Part Number 1=TC7WH08FKLJ(CTCT-ND, Category="Logic Gates", ComponentLink1Description=https://datasheet.ciiva.com:443/pdfs/VipMasterIC/IC/TOSC/TOSC-S-A0002811544/TOSC-S-A0002811544-1.pdf?src-supplier=IHS+Markit, ComponentLink1URL=https://datasheet.ciiva.com:443/pdfs/VipMasterIC/IC/TOSC/TOSC-S-A0002811544/TOSC-S-A0002811544-1.pdf?src-supplier=IHS+Markit, ComponentLink2Description=http://www.mouser.com/ds/2/408/TC7WH08FU_datasheet_en_20170424-1144181.pdf?src-supplier=Mouser, ComponentLink2URL=http://www.mouser.com/ds/2/408/TC7WH08FU_datasheet_en_20170424-1144181.pdf?src-supplier=Mouser, ComponentLink3Description=https://toshiba.semicon-storage.com/info/docget.jsp?did=20117&prodName=TC7WH08FU&src-supplier=Digi-Key, ComponentLink3URL=https://toshiba.semicon-storage.com/info/docget.jsp?did=20117&prodName=TC7WH08FU&src-supplier=Digi-Key, Logic Function=AND, Low Level Output Current=8mA, Manufacturer Part Number 1=TC7WH08FK,LJ(CT, Mount="Surface Mount", Number of Circuits=2, Number of Inputs=2, Number of Pins=8, Packaging="Tape and Reel", Pricing 1="1=0.41000, 10=0.30500, 25=0.27520, 100=0.19000, 250=0.16000, 500=0.13000, 1000=0.10000 (USD)", Propagation Delay=7.9ns, RoHS=Yes, Stock 1=703, Supplier 1=Digi-Key
U2: "74AHC Series 5 V High Speed Si-Gate CMOS Inverter Buffer Surface Mount - TSSOP-5", Manufacturer 1=Nexperia, Supplier Part Number 1=1727-3147-1-ND, ComponentLink1Description=https://datasheet.ciiva.com:443/pdfs/VipMasterIC/IC/NEXP/NEXP-S-A0003105567/NEXP-S-A0003105477-1.pdf?src-supplier=IHS+Markit, ComponentLink1URL=https://datasheet.ciiva.com:443/pdfs/VipMasterIC/IC/NEXP/NEXP-S-A0003105567/NEXP-S-A0003105477-1.pdf?src-supplier=IHS+Markit, Manufacturer Part Number 1=74AHC1G04GW,125, Pricing 1="1=0.21000, 10=0.17400, 25=0.14600, 100=0.09230, 250=0.07128, 500=0.06076, 1000=0.04131 (USD)", RoHS=No, Stock 1=10022, Supplier 1=Digi-Key
U3 U4: "IC DRIVER HI/LO SIDE 600V 8-SOIC", Case/Package=SOIC, Manufacturer 1="International Rectifier", Max Operating Temperature=125°C, Max Output Current=4A, Max Power Dissipation=625mW, Max Supply Current=240uA, Max Supply Voltage=20V, Min Operating Temperature=-40°C, Min Supply Voltage=10V, Package Quantity=1, Supplier Part Number 1=IRS2186STRPBFCT-ND, Category="Gate Drivers", ComponentLink1Description=https://datasheet.ciiva.com:443/pdfs/VipMasterIC/IC/IRSD/IRSD-S-A0000774532/IRSD-S-A0000774532-1.pdf?src-supplier=IHS+Markit, ComponentLink1URL=https://datasheet.ciiva.com:443/pdfs/VipMasterIC/IC/IRSD/IRSD-S-A0000774532/IRSD-S-A0000774532-1.pdf?src-supplier=IHS+Markit, ComponentLink2Description=https://datasheet.ciiva.com/1952/irs2186pbf-1952608.pdf?src-supplier=Digi-Key, ComponentLink2URL=https://datasheet.ciiva.com/1952/irs2186pbf-1952608.pdf?src-supplier=Digi-Key, ComponentLink3Description=https://datasheet.ciiva.com/16442/irs2186pbf-16442422.pdf?src-supplier=Future+Electronics, ComponentLink3URL=https://datasheet.ciiva.com/16442/irs2186pbf-16442422.pdf?src-supplier=Future+Electronics, ComponentLink4Description=https://datasheet.ciiva.com/1952/irs2186pbf-1952607.pdf?src-supplier=Digi-Key, ComponentLink4URL=https://datasheet.ciiva.com/1952/irs2186pbf-1952607.pdf?src-supplier=Digi-Key, Fall Time=30ns, Lead Free="Lead Free", Manufacturer Part Number 1=IRS2186STRPBF, Mount="Surface Mount", Nominal Supply Current=240uA, Number of Drivers=2, Number Of Outputs=2, Number of Pins=8, Output Current=4A, Packaging="Tape and Reel", Power Dissipation=625mW, Pricing 1="1=1.50000, 10=1.35000, 25=1.27400, 100=1.01920, 250=0.89180, 500=0.86632, 1000=0.68796 (USD)", Propagation Delay=250ns, Radiation Hardening=No, Rise Time=38ns, RoHS=Yes, Stock 1=2450, Supplier 1=Digi-Key, Turn-Off Delay Time=170ns, Turn-On Delay Time=170ns
U5: "Three Terminal Voltage Reference, 1 Output, 2.5V, Trim/Adjustable, PDSO3", Manufacturer 1="Texas Instruments", Reference Voltage=2.5V, Supplier Part Number 1=296-53203-1-ND, ComponentLink1Description=https://www.ti.com:443/lit/ds/symlink/atl431li.pdf?src-supplier=IHS+Markit, ComponentLink1URL=https://www.ti.com:443/lit/ds/symlink/atl431li.pdf?src-supplier=IHS+Markit, Manufacturer Part Number 1=ATL431LIBIDBZR, Pricing 1="1=0.48000, 10=0.41300, 25=0.38520, 100=0.28600, 250=0.24200, 500=0.23100, 1000=0.17050 (USD)", RoHS=No, Stock 1=2706, Supplier 1=Digi-Key
U6: "Switching Regulator, Current-mode, 3.9A, 500kHz Switching Freq-Max, PDSO6", Case/Package=SOT-23-6, Manufacturer 1="Texas Instruments", Max Input Voltage=28V, Max Operating Temperature=125°C, Min Input Voltage=4.5V, Min Operating Temperature=-40°C, Min Output Voltage=596mV, Output Current=2A, Quiescent Current=40uA, Supplier Part Number 1=296-44396-1-ND, Switching Frequency=500kHz, Category="Voltage Regulators - Switching", ComponentLink1Description=https://www.ti.com:443/lit/ds/symlink/tps54202h.pdf?src-supplier=IHS+Markit, ComponentLink1URL=https://www.ti.com:443/lit/ds/symlink/tps54202h.pdf?src-supplier=IHS+Markit, ComponentLink2Description=http://www.ti.com/lit/ds/symlink/tps54202h.pdf?src-supplier=Digi-Key, ComponentLink2URL=http://www.ti.com/lit/ds/symlink/tps54202h.pdf?src-supplier=Digi-Key, Lead Free="Lead Free", Manufacturer Part Number 1=TPS54202HDDCR, Max Output Voltage=28V, Mount="Surface Mount", Number Of Outputs=1, Output Configuration=Positive, Output Type=Adjustable, Packaging="Tape and Reel", Pricing 1="1=1.45000, 10=1.29800, 25=1.23200, 100=0.94600, 250=0.83600, 500=0.79200, 1000=0.61600 (USD)", RoHS=No, Stock 1=8470, Supplier 1=Digi-Key, Synchronous Rectifier=Yes

## Via types
v1: diameter 50, hole 28, Top Layer to Bottom Layer, tented both sides, 178 vias
v2: diameter 28, hole 20, Top Layer to Bottom Layer, tented both sides, 2 vias

## Nets (pads, with @x,y where several pads share a name; then routed paths per layer and width w, separated by ;. In a path a pad name is that pad's centre, name@x,y a point inside that pad or via, vN(x,y) a via of type N, cw(c..) or ccw(c..) an arc to the next point about the centre after c; other vN are vias at no path point)
3V3: C1.2 C2.2 C15.2 C16.2 C17.2 L1.1 R9.2 R15.2 TP15.1 U1.8 U2.5 | length 2651.2
  Top Layer w6: U2.5 U2.5@2735,821.93
  Top Layer w8: U1.8 C2.2@2990.47,934.29
  Top Layer w20: U2.5@2733.69,827.74 2733.69,953.45 C1.2
  Top Layer w30: C1.2@2750,954.76 2750.24,955 3073.23,955 3250,1131.77 3250,2070 3172.91,2147.09 3172.91,2148.58 3151.5,2170 TP15.1 TP15.1@3088.5,2170 ; R9.2 2837.4,1987.4 2900,2050 2970,2050 3067.09,2147.09 3067.09,2148.58 TP15.1@3088.5,2170 ; C16.2 3006.02,2253.98 3067.09,2192.91 3067.09,2191.42 TP15.1@3088.5,2170
17V: C3.2 C4.2 D1.1 D2.1 R10.2 R12.2 R13.2 TP13.1 U3.5 U4.5 U5.1 | length 3821.4
  Top Layer w15: D1.1 206.1,1896.06 211,1891.16 287.65,1814.52 287.65,1687.35 324.7,1650.3 345.93,1650.3 U3.5 C4.2@351.22,1555.24 ; C3.2 2444.76,1893.31 2433.5,1882.05 2432.05,1882.05 2388.78,1838.78 U4.5 2463.28,1795 2475,1783.28 2475,1551.1 D2.1
  Top Layer w20: v1(265,1645) 265,1585 300,1550 C4.2 ; TP13.1 2671.5,1995 2740,1926.5 2740,1815 2825.47,1729.53 2826.73,1729.53 2837.4,1718.86 R10.2
  Bottom Layer w20: v1(265,1645) 615,1995 v1(2430,1995) v1(2525,1995)
24V: C9.2 C10.2 C11.2 C12.2 C13.2 C14.2 D3.2 D4.2 D10.2 J2.1 Q1.3 Q2.3 Q3.3 Q4.3 R11.2 R12.1 TP12.1 U6.3 | length 307.9
  Top Layer w30: C14.2 2744.76,3065.24 2854.13,2955.87 U6.3
  other v1: 2110,2105 950,2125 1050,2125 1375,2125 1750,2135 2195,2150 805,2200 900,2200 995,2200 1210,2200 1300,2200 1590,2200 1700,2200 1795,2200 1995,2200 2100,2200 2300,2200 1500,2600 1700,2600 1900,2600 2100,2600 1600,2800 1800,2800 2000,2800 2200,2800 1500,3000 1700,3000 1900,3000 2100,3000
BOOTSTRAP_L: C6.2 D1.2 TP4.1 U3.8 | length 425.9
  Top Layer w15: D1.2 335,1900 365,1930 TP4.1 C6.2 398.9,1822.99 370.91,1795 U3.8
BOOTSTRAP_R: C5.2 D2.2 TP5.1 U4.8
DIR: J1.2 TP2.1 U1.1 U2.2 U4.2 | length 2254.3
  Top Layer w10: U4.2 2680,1695 2875,1500 TP2.1 2875,1300 v1(2875,1067.5) ; U2.2 2760,520 J1.2 2990.47,530.47 U1.1
  Bottom Layer w10: J1.2 2870,625.9 2965,720.9 2965,915 2875,1005 v1(2875,1067.5)
DIR_INV: TP3.1 U1.5 U2.4 U3.2 | length 3565.8
  Top Layer w10: U2.4 2841.93,765 3000.92,765 3048.62,812.7 3048.62,850.12 U1.5
  Top Layer w15: v2@53,1744 117.68,1744 118.68,1745 123.73,1739.95 U3.2 ; v1(2219.75,878.75) 2220,879 TP3.1 2572.92,850.08 2604.92,850.08 2661,794 2758.25,794 U2.4
  Bottom Layer w15: v2(50,1744) 319,1475 1620,1475 2216.25,878.75 v1(2219.75,878.75)
FB: C15.1 R15.1 R16.2 U6.4 | length 579.7
  Top Layer w15: U6.4 2712.4,2917.4 2670,2875 2670,2730.47 2768.5,2631.97 2768.5,2630 2767.4,2628.9 R15.1 R16.2
GND: C1.1 C2.1 C3.1 C4.1 C9.1 C10.1 C11.1 C12.1 C13.1 C14.1 C16.1 C17.1 D5.1 D6.1 D7.2 D8.2 D9.2 D10.1 J1.3 J2.2 Q5.1 Q6.1 Q7.1 Q8.1 R7.2 R8.1 R14.1 R16.1 TP14.1 TP16.1 U1.4 U2.3 U3.3 U4.3 U5.3 U6.1
  other v1: 300,300 600,300 2100,300 2400,300 2700,300 3000,300 3300,300 450,600 2250,600 2550,600 3450,600 2825,605 2930,605 3090,605 3105,690 2880,695 300,900 600,900 2100,900 3300,900 1935,1075 2190,1115 2110,1190 2270,1190 450,1200 2550,1200 3150,1200 3450,1200 710,1220 790,1220 640,1260 715,1320 615,1345 795,1350 1925,1400 2000,1400 2075,1400 675,1410 760,1425 1950,1470 2045,1470 210,1495 3000,1500 3300,1500 2000,1530 505,1545 600,1545 730,1585 1945,1590 555,1600 650,1600 790,1625 215,1710 3150,1800 3450,1800 300,2100 600,2100 3300,2100 2445,2155 2440,2230 2510,2255 3140,2320 1295,2370 3220,2380 1230,2390 450,2400 750,2400 1050,2400 2550,2400 3450,2400 3220,2460 1210,2465 1175,2540 3220,2540 1240,2590 1320,2590 3220,2620 300,2700 600,2700 900,2700 2400,2700 2550,2700 3300,2700 2765,2715 2865,2730 2805,2775 2905,2790 2260,2890 2340,2890 2420,2890 2500,2890 2580,2910 2650,2930 450,3000 750,3000 1050,3000 3450,3000 300,3300 600,3300 900,3300 1200,3300 1500,3300 1800,3300 3000,3300 3300,3300 2220,3310 2740,3310 2240,3390 2320,3390 2400,3390 2480,3390 2560,3390 2640,3390 2720,3390
HIGH_SIDE_M: TP9.1 U1.3 U4.1 | length 1256.2